# Altium PCB VM53_BASE_BOARD.PcbDoc (part 1 of 2)
Units mil, origin at the board's own origin, x right, y up, seen from the top; angles counter-clockwise.
Board outline 6151.77 x 3750.19 mil, 4 copper layers (Top Layer, Internal Plane 1, Internal Plane 2, Bottom Layer), stack 30.635 mil thick; 190 components, 126 nets, 711 pads, 402 vias.
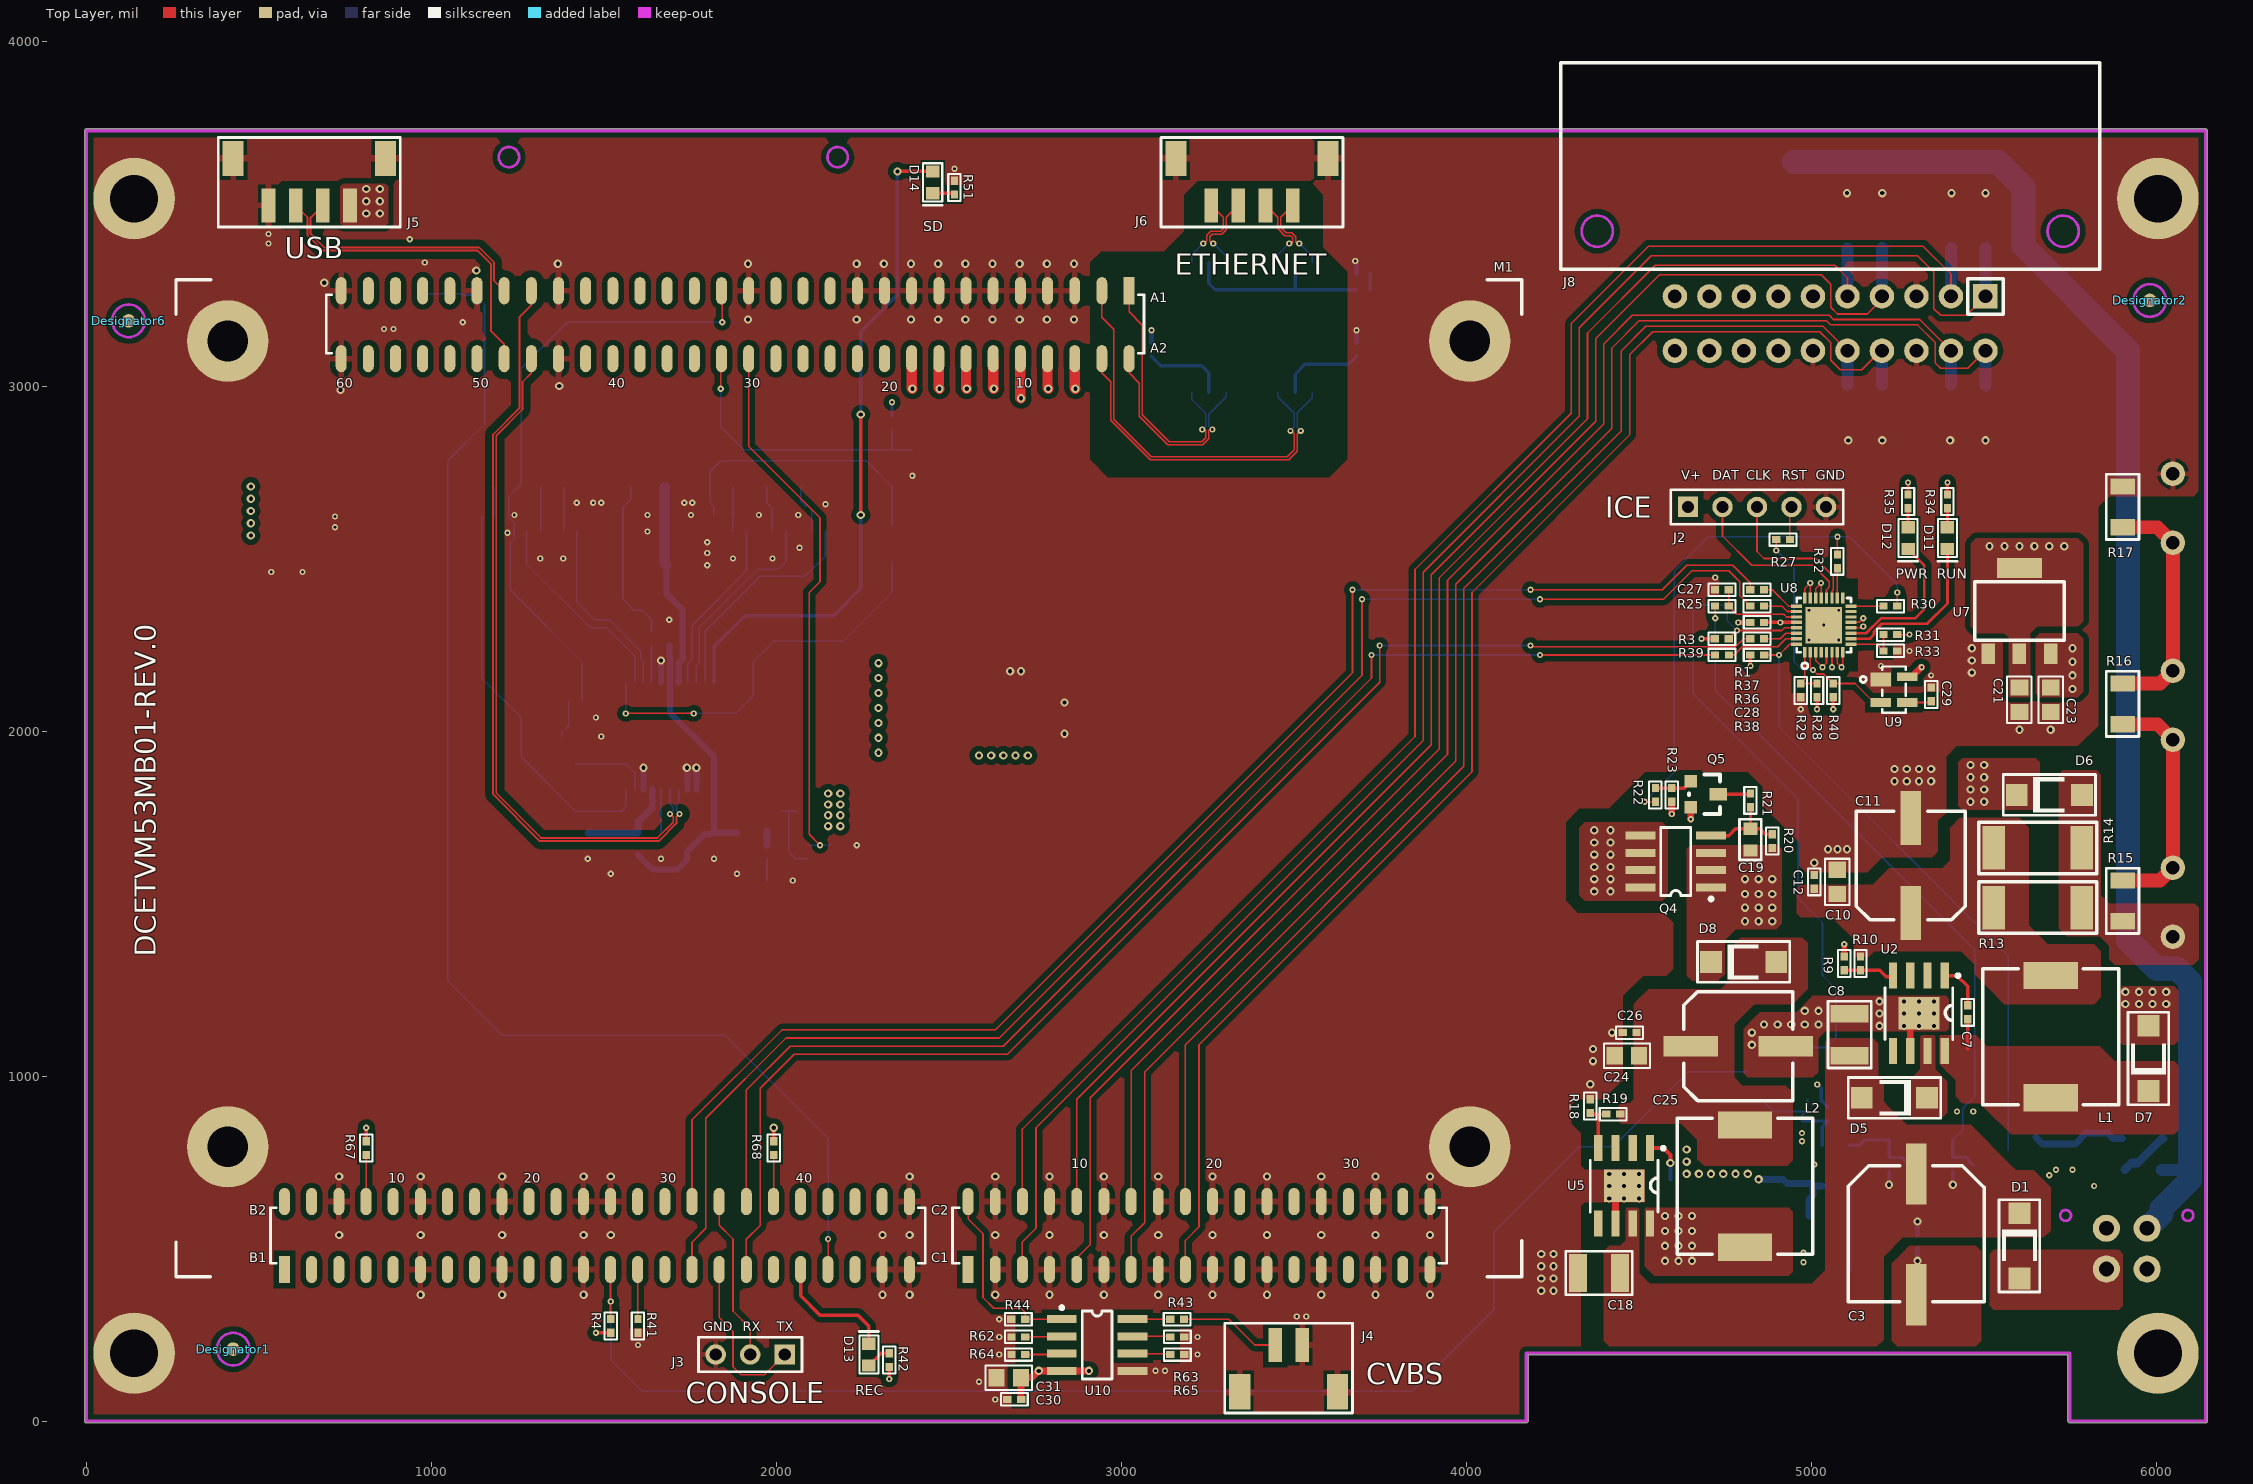
[diagram p0: Top Layer view]
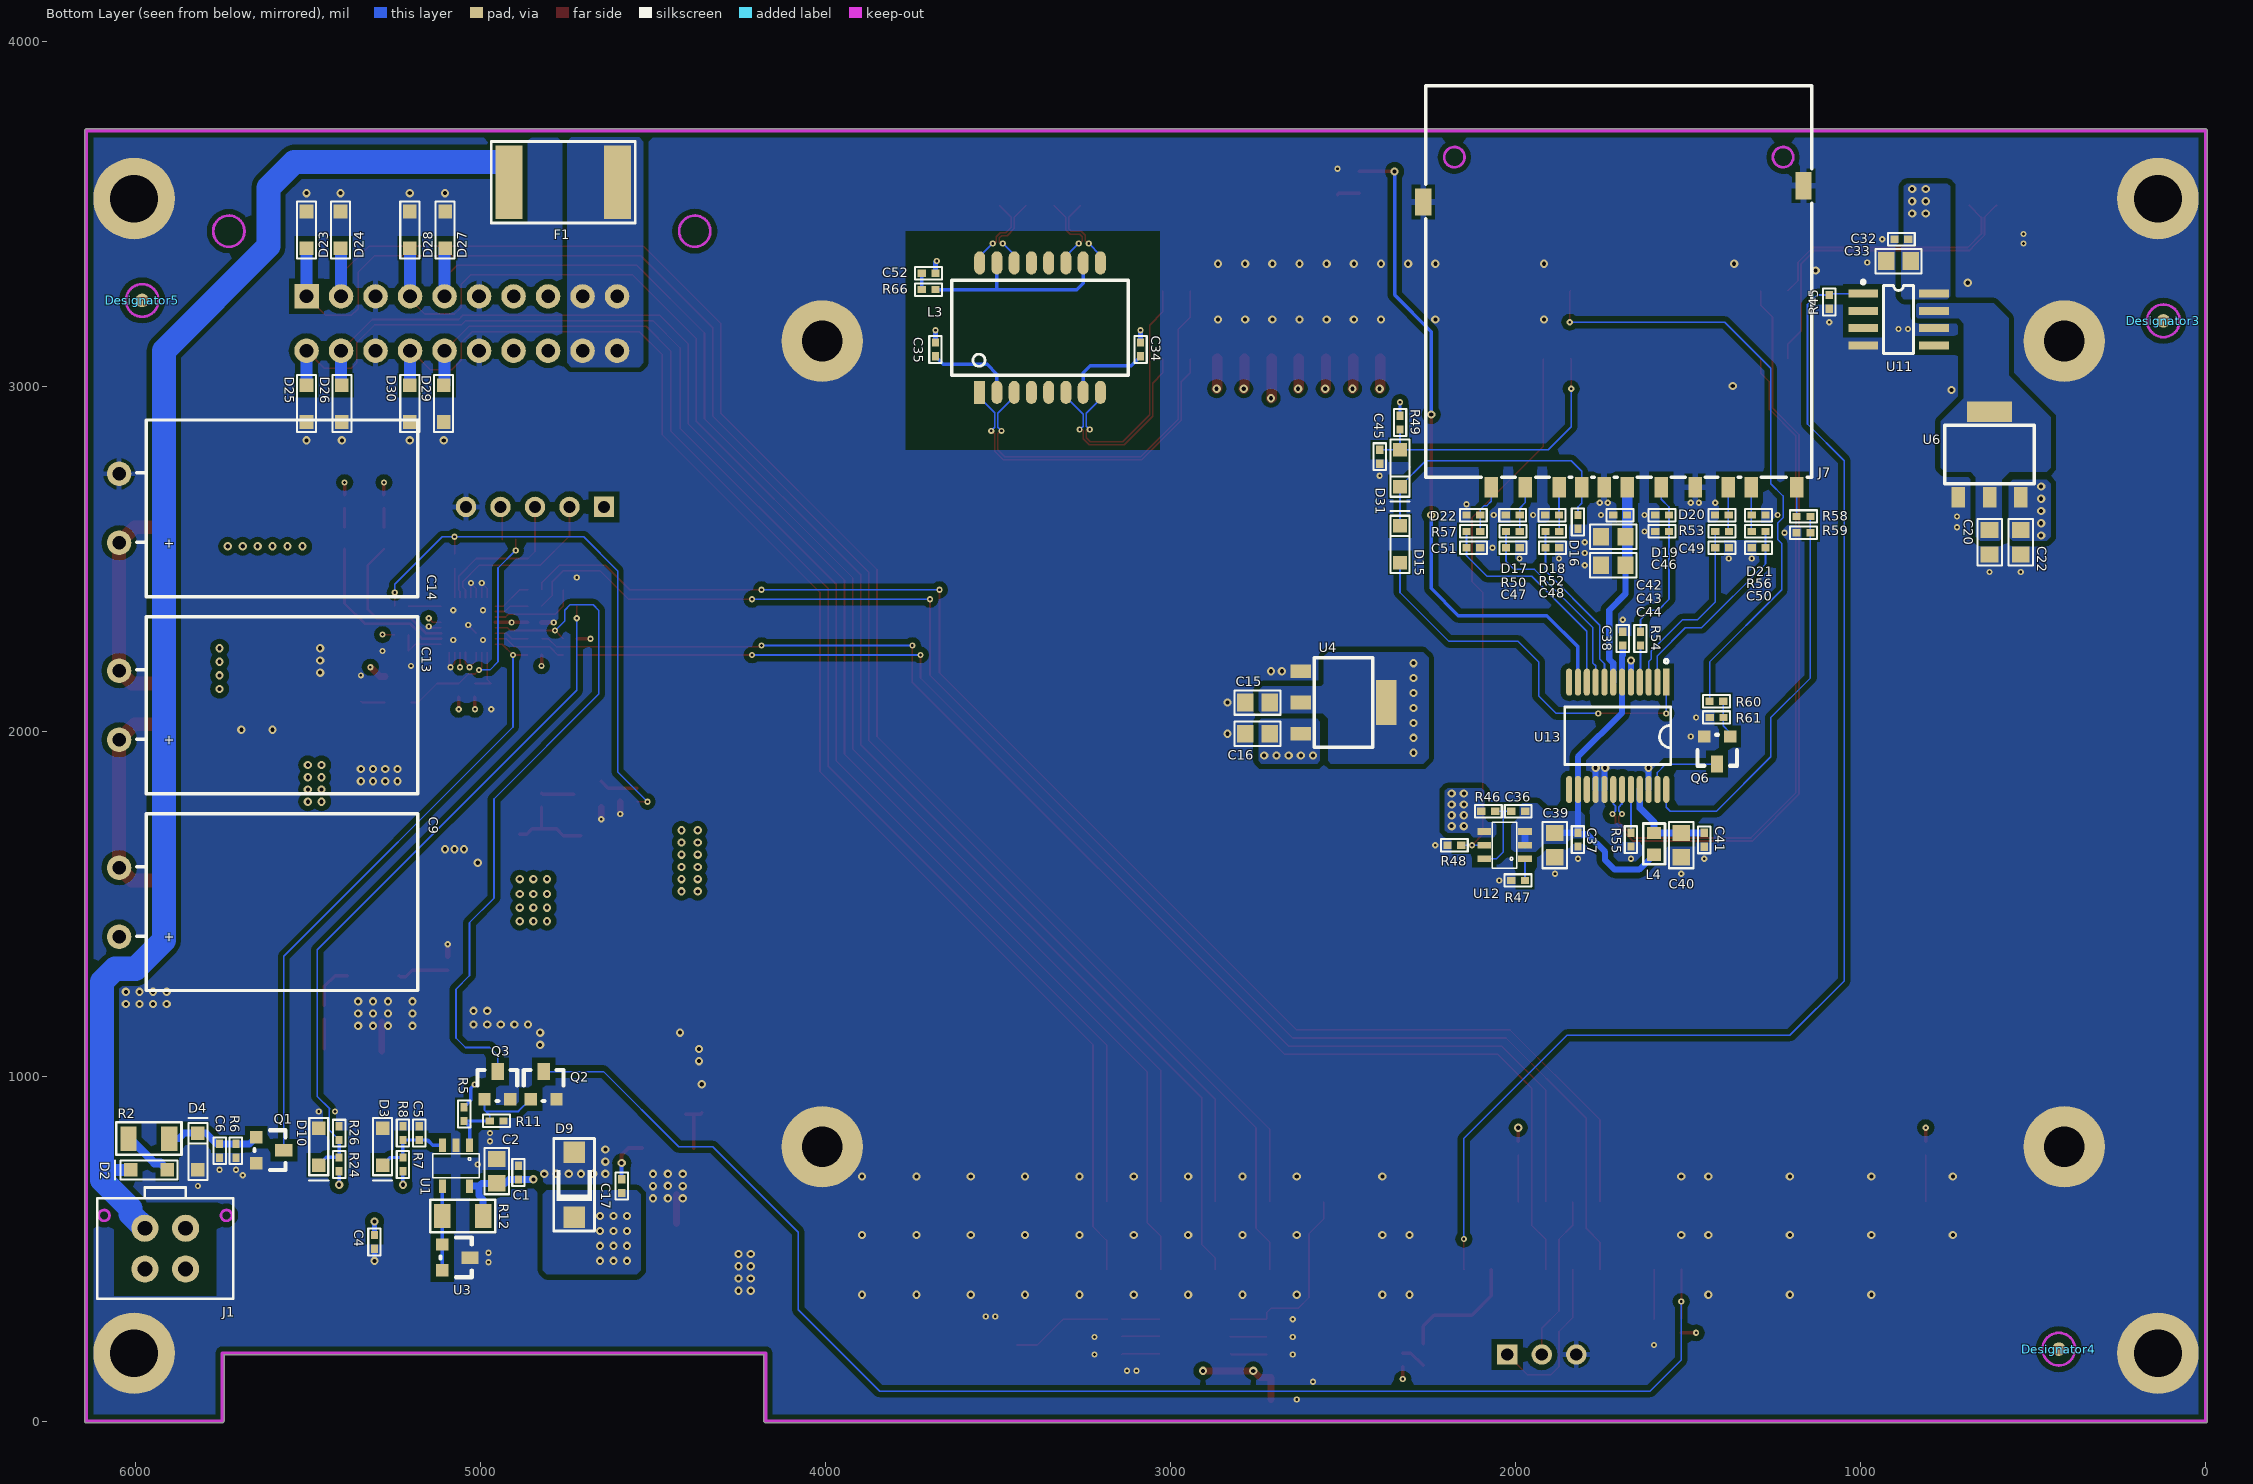
[diagram p1: Bottom Layer view, seen from below]
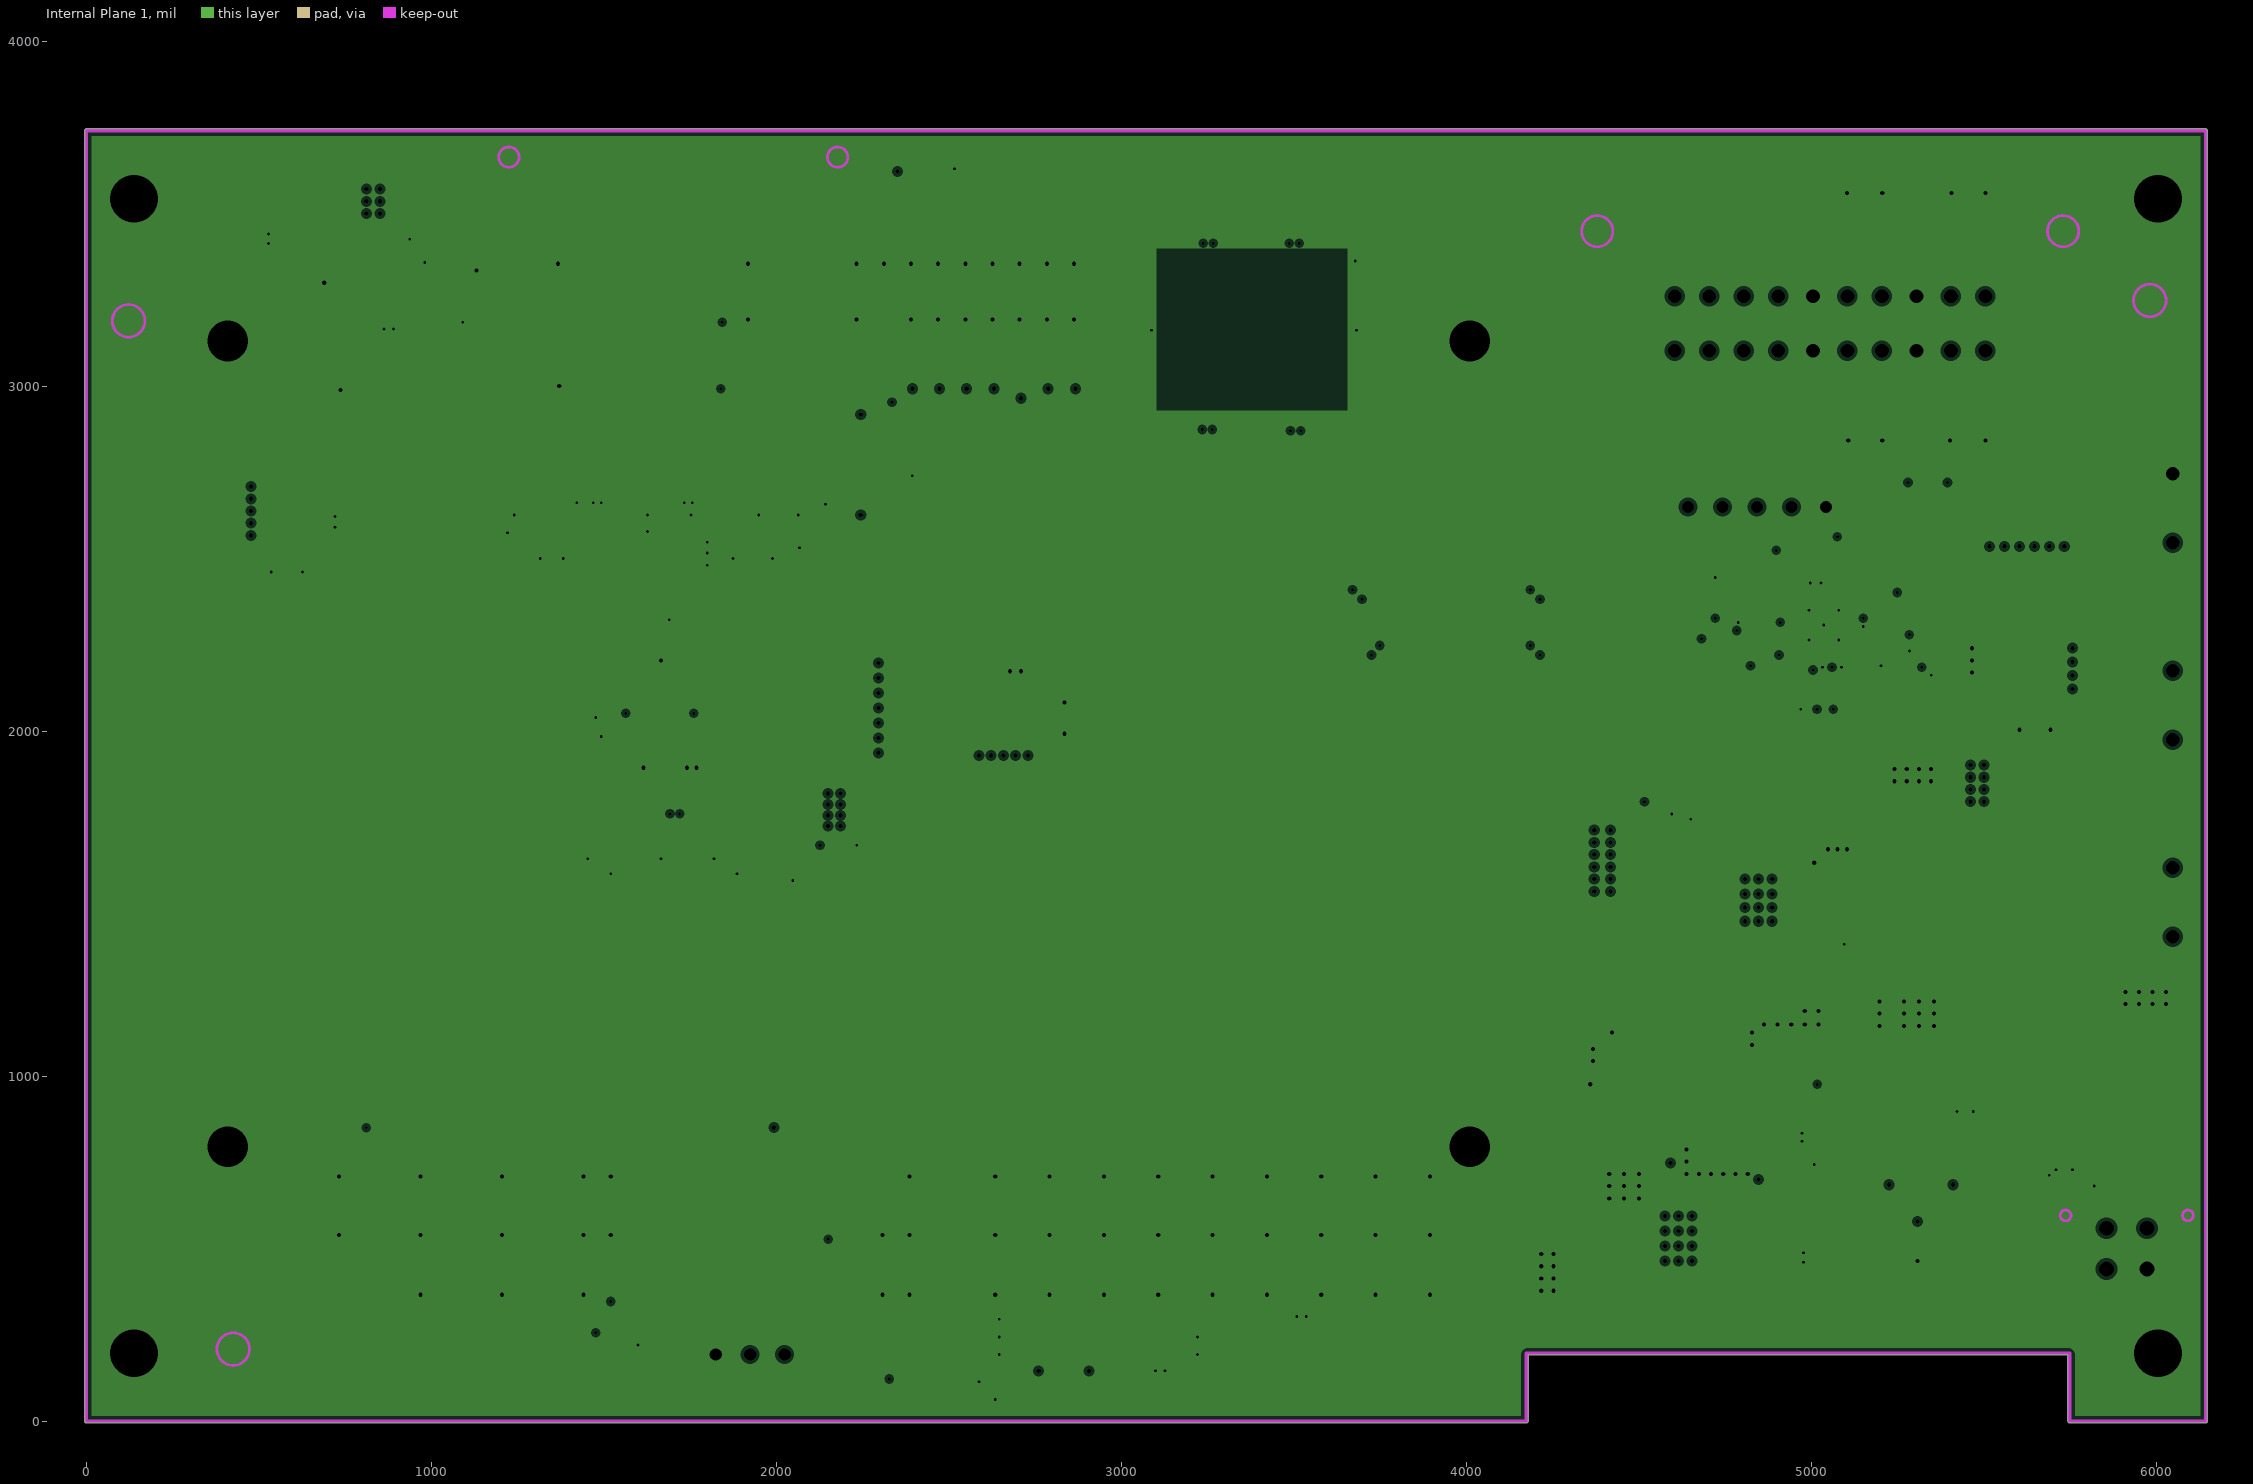
[diagram p2: Internal Plane 1, clearances drawn from the general rule]
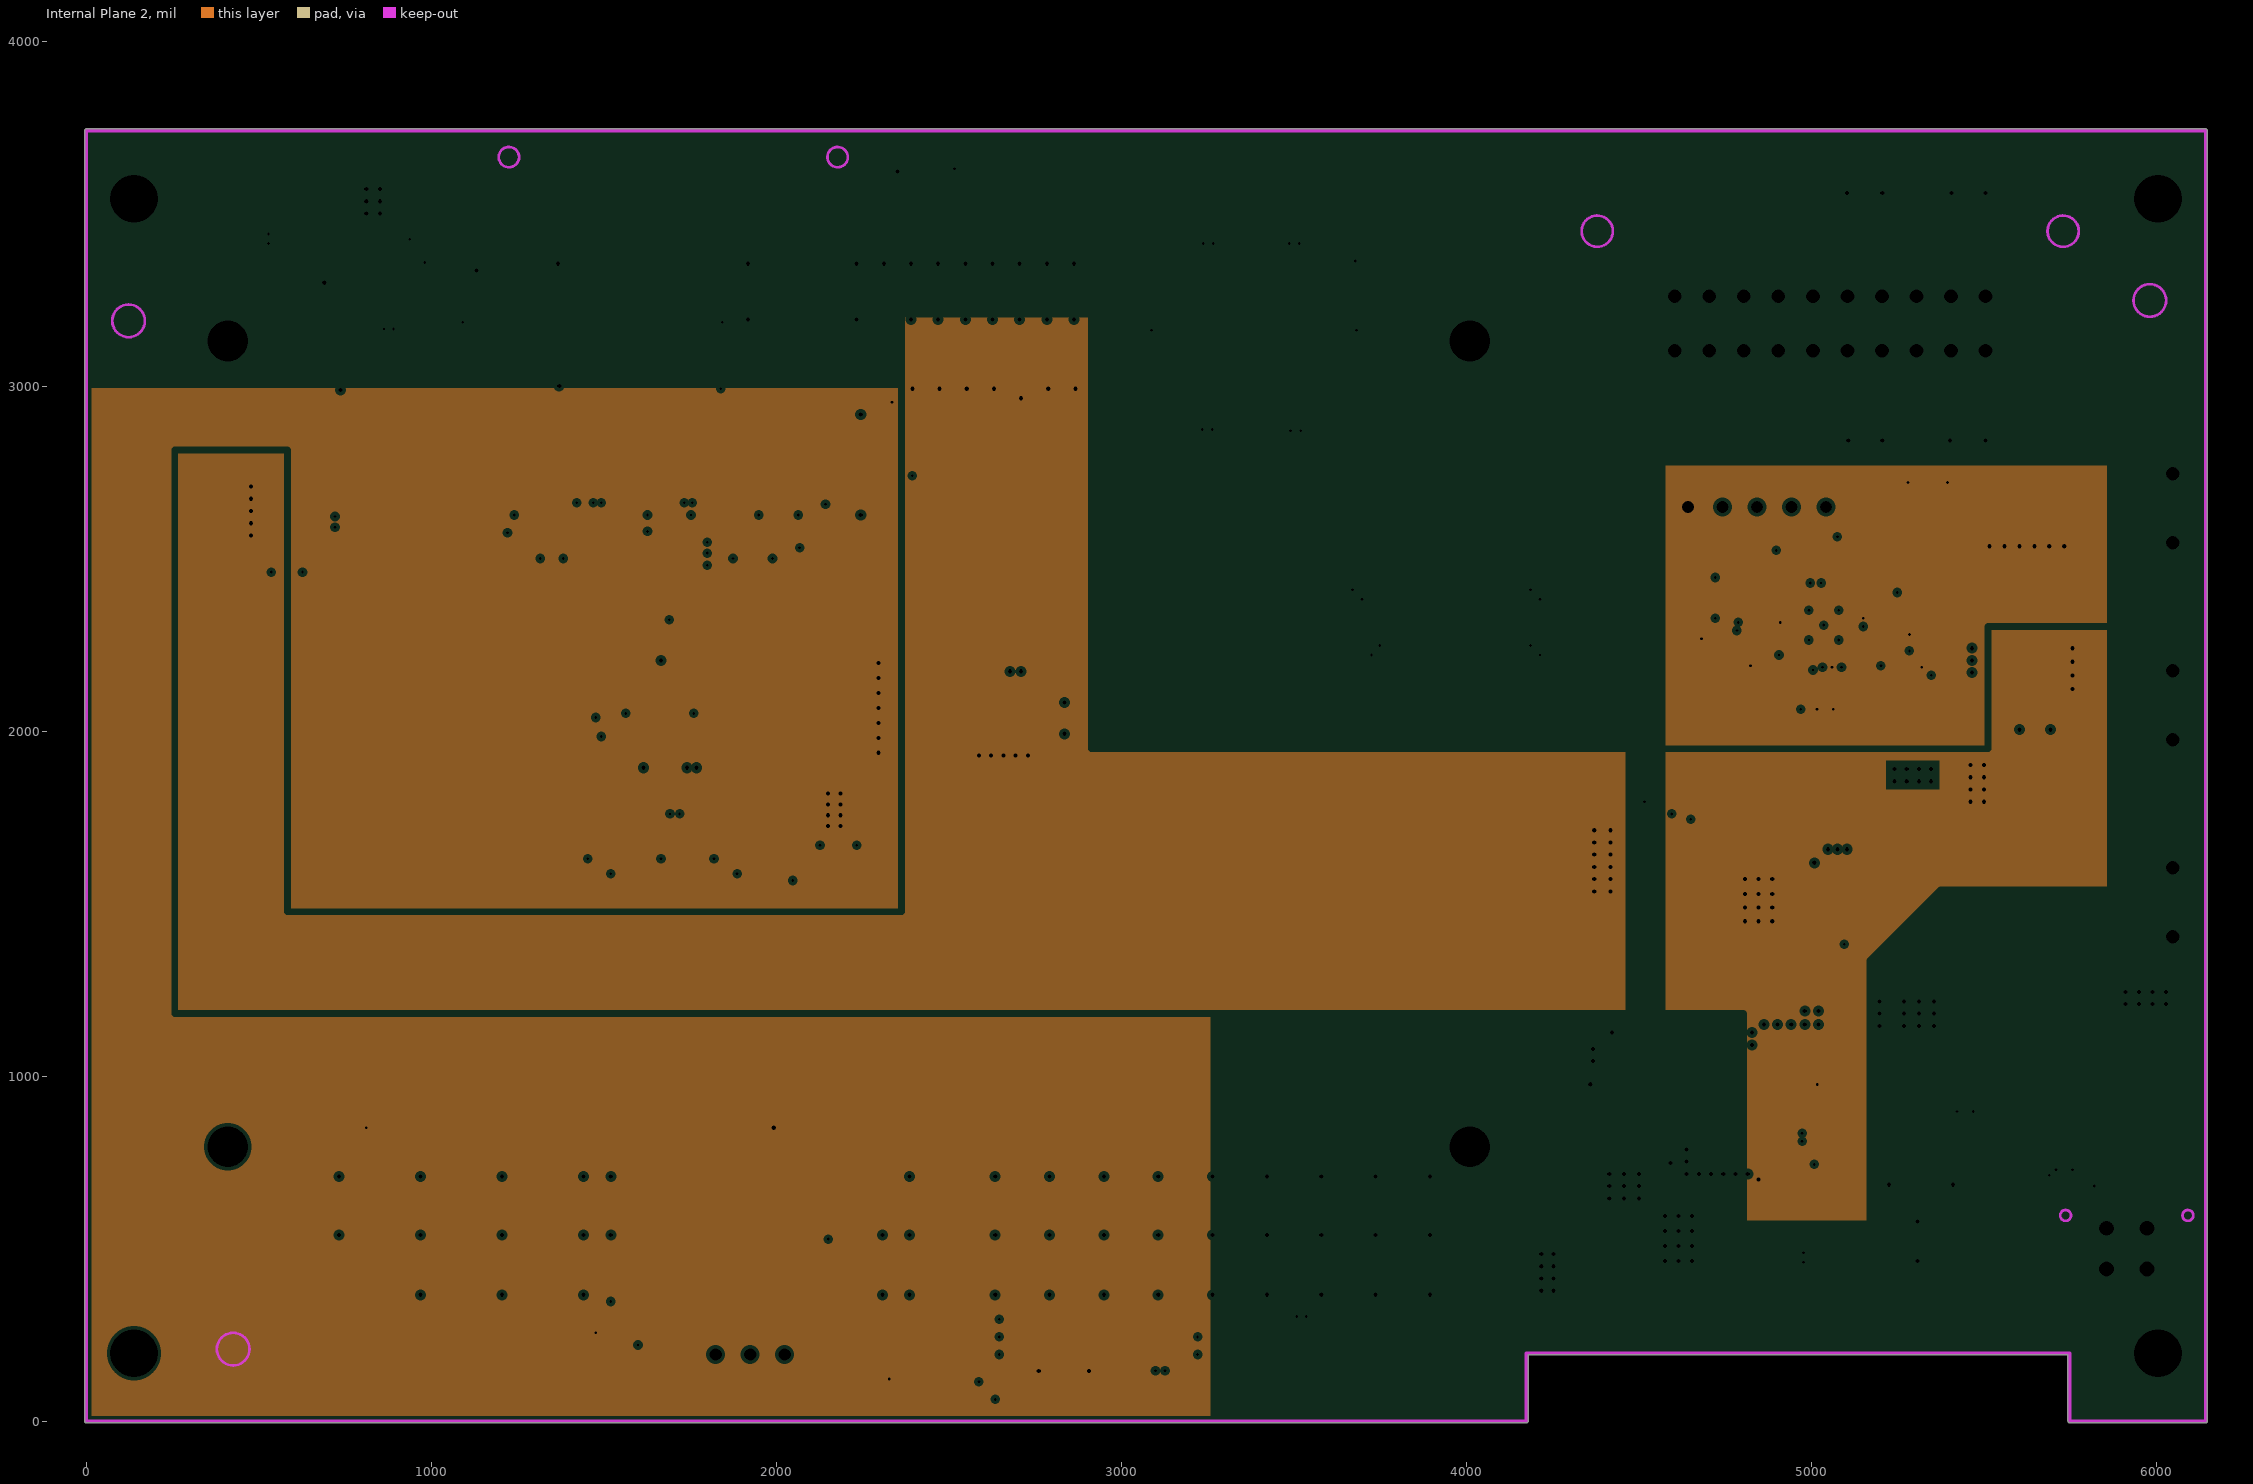
[diagram p3: Internal Plane 2, clearances drawn from the general rule]

## Layer stack, top to bottom
Top Solder: solder mask 0.4, Solder Resist, Dk 3.5
Top Layer: signal copper 1.4
Dielectric 1: core 10, FR-4, Dk 4.2
Internal Plane 1: plane copper 1.4173
Dielectric 3: prepreg 5, Dk 4.2
Internal Plane 2: plane copper 1.4173
Dielectric 2: core 10, Dk 4.2
Bottom Layer: signal copper 1.4
Bottom Solder: solder mask 0.4, Solder Resist, Dk 3.5

## Board outline
-5.02,0 ccw(c0,0) 0,-5.02 4173.23,-5.02 ccw(c4173.23,0) 4178.25,0 4178.25,191.84 5743.02,191.84 5743.02,0 ccw(c5748.03,0) 5748.03,-5.02 6141.74,-5.02 ccw(c6141.74,0) 6146.75,0 6146.75,3740.16 ccw(c6141.74,3740.16) 6141.74,3745.17 0,3745.17 ccw(c0,3740.16) -5.02,3740.16

## Design rules (kind name [scope] priority, off if disabled: settings)
Clearance Clearance_3 [(InDifferentialPairClass('All Differential Pairs')) vs InPolygon AND InNet('GND')] p1: gap=20
Clearance Clearance_2 [InPolygon AND InNet('GND')] p2: gap=15
Clearance Clearance_1 [InComponent('U8')] p3: gap=3
Clearance [All] p4: gap=5
ComponentClearance [All] p1: gap=0 collisioncheckmode=3 verticalgap=0 showdistances=FALSE
DiffPairsRouting DiffPairsRouting_1 [InDifferentialPairClass('ETH_DIFF')] p1: maxlimit=5.2 minlimit=5.2 mostfreqgap=5.2 toplayer_minwidth=3.8 toplayer_maxwidth=3.8 toplayer_prefwidth=3.8 bottomlayer_minwidth=3.8 bottomlayer_maxwidth=3.8 bottomlayer_prefwidth=3.8 maxuncoupledlength=500
DiffPairsRouting [InDifferentialPairClass('USB_DIFF')] p2: maxlimit=3.7 minlimit=3.7 mostfreqgap=3.7 toplayer_minwidth=5.3 toplayer_maxwidth=5.3 toplayer_prefwidth=5.3 bottomlayer_minwidth=5.3 bottomlayer_maxwidth=5.3 bottomlayer_prefwidth=5.3 maxuncoupledlength=500
PlaneClearance PlaneClearance_3 [InNet('PBKP')] p1: clearance=20
PlaneClearance PlaneClearance_2 [InComponent('J1')] p2: clearance=25
PlaneClearance PlaneClearance_1 [InPadClass('MT')] p3: clearance=40
PlaneClearance [All] p4: clearance=10
PlaneConnect PlaneConnect_3 [InComponent('J1')] p1: planeconnectstyle=Relief reliefexpansion=20 reliefentries=4 reliefconductorwidth=25 reliefairgap=15
PlaneConnect PlaneConnect_2 [IsVia] p2: planeconnectstyle=Direct reliefexpansion=20 reliefentries=4 reliefconductorwidth=10 reliefairgap=10
PlaneConnect PlaneConnect_1 [InPadClass('MT')] p3: planeconnectstyle=Direct reliefexpansion=20 reliefentries=4 reliefconductorwidth=10 reliefairgap=10
PlaneConnect [All] p4: planeconnectstyle=Relief reliefexpansion=20 reliefentries=4 reliefconductorwidth=10 reliefairgap=10
PolygonConnect PolygonConnect_4 [(InComponent('J4') OR InComponent('J5') OR InComponent('J6') OR InComponent('J7'))] p1: connectstyle=Relief reliefconductorwidth=18 reliefentries=4 polygonreliefangle="90 Angle" airgapwidth=10
PolygonConnect PolygonConnect_3 [(InComponent('J8') OR InComponent('J2') OR InComponent('J3') OR InComponent('C14'))] p2: connectstyle=Relief reliefconductorwidth=15 reliefentries=4 polygonreliefangle="90 Angle" airgapwidth=10
PolygonConnect PolygonConnect_2 [InPadClass('MT')] p3: connectstyle=Direct reliefconductorwidth=10 reliefentries=4 polygonreliefangle="90 Angle" airgapwidth=10
PolygonConnect PolygonConnect_1 [InComponent('M1')] p4: connectstyle=Relief reliefconductorwidth=18 reliefentries=4 polygonreliefangle="90 Angle" airgapwidth=15
PolygonConnect [All] p5: connectstyle=Direct reliefconductorwidth=10 reliefentries=4 polygonreliefangle="90 Angle" airgapwidth=10
RoutingVias [All] p1: holewidth=8 width=18 viastyle="Through Hole" minholewidth=8 minwidth=18 maxholewidth=20 maxwidth=40
SolderMaskExpansion [All] p1: expansion=4
Width [All] p1: maxlimit=200 minlimit=3 preferedwidth=4.7 minimp=50.000000 maximp=50.000000 favimp=50.000000
26 further rules are at their usual default settings.

## Classes and differential pairs
component class 07-VIDEO_PORT: D23 D24 D25 D26 D27 D28 D29 D30 F1 J8
component class 06-SD_CARD: C36 C37 C38 C39 C40 C41 C42 C43 C44 C45 C46 C47 C48 C49 C50 C51 D14 D15 D16 D17 D18 D19 D20 D21 D22 D31 J7 L4 Q6 R46 R47 R48 R49 R50 R51 R52 R53 R54 R55 R56 R57 R58 R59 R60 R61 U12 U13
component class 05-USB_ETHERNET: C32 C33 C34 C35 C52 J5 J6 L3 R45 R66 U11
component class 04-VIDEO_OUT: C30 C31 J4 R43 R44 R62 R63 R64 R65 U10
component class 03-CORE_BOARD: D13 J3 M1 R41 R42 R67 R68
component class 02-MCU: C27 C28 C29 D10 D11 D12 J2 R24 R25 R26 R27 R28 R29 R30 R31 R32 R33 R34 R35 R36 R37 R38 R39 R40 U8 U9
component class 01-POWER: C1 C2 C3 C4 C5 C6 C7 C8 C9 C10 C11 C12 C13 C14 C15 C16 C17 C18 C19 C20 C21 C22 C23 C24 C25 C26 D1 D2 D3 D4 D5 D6 D7 D8 D9 J1 L1 L2 Q1 Q2 Q3 Q4 Q5 R1 R2 R3 R4 R5 R6 R7 R8 R9 R10 R11 R12 R13 R14 R15 R16 R17 R18 R19 R20 R21 R22 R23 U1 U2 U3 U4 U5 U6 U7
pad class MT: Free-MT1 Free-MT2 Free-MT3 Free-MT4 M1-MT5 M1-MT6 M1-MT7 M1-MT8
differential pair class USB_DIFF: USB0 USB1
differential pair class ETH_DIFF: E0-RX E0-TX ETH-RX ETH-TX
differential pair USB1: +USB1_P -USB1_N
differential pair USB0: +USB0_P -USB0_N
differential pair ETH-TX: +ETH-TX_P -ETH-TX_N
differential pair ETH-RX: +ETH-RX_P -ETH-RX_N
differential pair E0-TX: +E0-TX_P -E0-TX_N
differential pair E0-RX: +E0-RX_P -E0-RX_N

## Components (designator, comment, footprint, x,y, rotation, side; value= is the part's Value field where it differs from the comment)
C1 "0.1uF/50V" 0402 4889.76,720.47 r270 bottom
C2 "10uF/16V" 0805 4952.76,759.84 r270 bottom
C3 "220uF/50V" DL-10*10.5 5303.15,543.31 r0 top
C4 "0.1uF/50V" 0402 5307.09,519.68 r270 bottom
C5 "0.1uF/50V" 0402 5177.17,834.65 r90 bottom
C6 "0.1uF/50V" 0402 5755.91,783.46 r90 bottom
C7 "0.01uF/50V" 0402 5452.76,1185.04 r270 top
C8 "10uF/50V" 1210 5110.24,1059.06 r90 top
C9 "10F/2.7V" SUPERCAP 6047.24,1503.94 r90 bottom locked
C10 "4.7uF/16V" 0805 5074.8,1598.43 r270 top
C11 "220uF/25V" DL-8*10.5 5287.4,1610.24 r180 top
C12 "0.1uF/50V" 0402 5007.87,1562.99 r90 top
C13 "10F/2.7V" SUPERCAP 6047.24,2074.8 r90 bottom locked
C14 "10F/2.7V" SUPERCAP 6047.24,2645.67 r90 bottom locked
C15 "10uF/16V" 0805 2712.6,2082.68 r0 bottom
C16 "10uF/16V" 0805 2712.6,1992.13 r0 bottom
C17 "0.01uF/50V" 0402 4590.55,681.1 r270 bottom
C18 "10uF/50V" 1210 4444.88,429.13 r180 top
C19 "1uF/16V" 0603 4822.83,1685.04 r0 top
C20 "10uF/16V" 0805 625.98,2582.68 r270 bottom
C21 "10uF/16V" 0805 5602.36,2125.98 r270 top
C22 "10uF/16V" 0805 535.43,2582.68 r270 bottom
C23 "10uF/16V" 0805 5692.91,2125.98 r270 top
C24 "4.7uF/16V" 0805 4429.13,1059.06 r0 top
C25 "220uF/25V" DL-8*10.5 4787.4,1086.61 r90 top
C26 "0.1uF/50V" 0402 4472.44,1125.98 r180 top
C27 "0.1uF/50V" 0402 4739.97,2409.45 r0 top
C28 "0.1uF/50V" 0402 4842.14,2314.96 r0 top
C29 "0.1uF/50V" 0402 5346.46,2106.3 r270 top
C30 "0.1uF/50V" 0402 2688.98,62.99 r0 top
C31 "10uF/16V" 0805 2708.66,125.98 r180 top
C32 "0.1uF/50V" 0402 881.89,3425.2 r180 bottom
C33 "10uF/16V" 0805 854.33,3362.2 r0 bottom
C34 "0.01uF/50V" 0402 3086.61,3106.3 r270 bottom
C35 "0.01uF/50V" 0402 3681.1,3106.3 r270 bottom
C36 "0.47uF/6.3V" 0402 1992.13,1767.72 r180 bottom
C37 "0.1uF/50V" 0402 1818.9,1685.04 r90 bottom
C38 "0.1uF/50V" 0402 1688.98,2267.72 r90 bottom
C39 "22uF/6.3V" 0805 1885.83,1704.72 r270 bottom
C40 "10uF/16V" 0805 1519.68,1704.72 r270 bottom
C41 "0.1uF/50V" 0402 1452.76,1685.04 r270 bottom
C42 "0.1uF/50V" 0402 1696.85,2625.98 r0 bottom
C43 "10uF/16V" 0805 1751.97,2562.99 r180 bottom
C44 "4.7uF/16V" 0805 1751.97,2480.31 r180 bottom
C45 "0.1uF/50V" 0402 2393.7,2795.28 r270 bottom
C46 "DNP" 0402 1574.99,2578.74 r0 bottom
C47 "DNP" 0402 2007.69,2531.5 r180 bottom
C48 "DNP" 0402 1893.26,2531.5 r180 bottom
C49 "DNP" 0402 1401.39,2531.5 r180 bottom
C50 "DNP" 0402 1295.28,2531.5 r0 bottom
C51 "DNP" 0402 2122.05,2531.5 r180 bottom
C52 "0.1uF/50V" 0402 3700.79,3326.77 r0 bottom
D1 "B360A" B320A 5602.36,413.39 r90 top
D2 "MM3Z5V1ST1G" SOD323F 5960.63,728.35 r180 bottom
D3 "MM3Z5V1ST1G" SOD323F 5283.46,795.28 r90 bottom
D4 "1N5819HW" 1N5819 5818.9,834.65 r270 bottom
D5 "B360A" B320A 5145.67,937.01 r0 top
D6 "B360A" B320A 5783.46,1814.96 r180 top
D7 "B360A" B320A 5976.38,1145.67 r270 top
D8 "B360A" B320A 4897.64,1330.71 r180 top
D9 "B360A" B320A 4728.35,779.53 r270 bottom
D10 "MM3Z4V7ST1G" SOD323F 5468.5,795.28 r90 bottom
D11 "LED GREEN" LED0603 5393.7,2590.55 r0 top
D12 "LED GREEN" LED0603 5279.53,2590.55 r0 top
D13 "LED GREEN" LED0603 2267.72,161.42 r180 top
D14 "LED GREEN" LED0603 2452.76,3622.05 r0 top
D15 "1N5819HW" 1N5819 2334.65,2594.49 r270 bottom
D16 "ESD0402E002M05" 0402 1818.9,2606.3 r270 bottom
D17 "ESD0402E002M05" 0402 2007.87,2625.98 r0 bottom
D18 "ESD0402E002M05" 0402 1893.7,2625.98 r0 bottom
D19 "ESD0402E002M05" 0402 1574.99,2625.98 r0 bottom
D20 "ESD0402E002M05" 0402 1401.57,2625.98 r0 bottom
D21 "ESD0402E002M05" 0402 1295.28,2625.98 r180 bottom
D22 "ESD0402E002M05" 0402 2122.05,2625.98 r0 bottom
D23 "PESD5V0L1BA" PESD 5503.94,3452.76 r90 bottom
D24 "PESD5V0L1BA" PESD 5405.51,3452.76 r90 bottom
D25 "PESD5V0L1BA" PESD 5503.94,2948.82 r270 bottom
D26 "PESD5V0L1BA" PESD 5401.57,2948.82 r270 bottom
D27 "PESD5V0L1BA" PESD 5102.36,3452.76 r270 bottom
D28 "PESD5V0L1BA" PESD 5204.72,3452.76 r270 bottom
D29 "PESD5V0L1BA" PESD 5106.3,2948.82 r90 bottom
D30 "PESD5V0L1BA" PESD 5204.72,2948.82 r90 bottom
D31 "1N5819HW" 1N5819 2334.65,2708.66 r90 bottom
Designator1 "Comment" MARK 425.2,208.66 r0 top locked
Designator2 "Comment" MARK 5980.32,3248.03 r0 top locked
Designator3 "Comment" MARK 122.05,3188.98 r180 bottom locked
Designator4 "Comment" MARK 425.2,208.66 r180 bottom locked
Designator5 "Comment" MARK 5980.32,3248.03 r180 bottom locked
Designator6 "Comment" MARK 122.05,3188.98 r0 top locked
F1 "3A/16V" 2920 4917.32,3590.55 r180 bottom
J1 "POWER" 3030WV-F-2*2P 5913.39,500 r180 bottom
J2 "MCU ICE" HDR1X5 4641.73,2649.61 r0 top
J3 "DEBUG" HDR1X3 2023.62,192.91 r180 top
J4 "CVBS OUT" CONN-2.0-SMD-2P-V 3444.88,220.47 r0 top
J5 "USB HOST" CONN-2.0-SMD-4P-V 763.78,3523.62 r180 top
J6 "ETHERNET" CONN-2.0-SMD-4P-V 3496.06,3523.62 r180 top
J7 "SDCARD" SDCARD 1700.79,2736.22 r0 bottom locked
J8 "Header 10X2" CONN2X10 5503.94,3102.36 r270 top locked
L1 "8.2uH/3A" IND_10X10 5692.91,1114.17 r180 top
L2 "8.2uH/3A" IND_10X10 4807.09,681.1 r180 top
L3 "TRC1102" TRC1102 3377.95,3169.29 r90 bottom
L4 "120ohm/100MHz 1A" 0603 1598.43,1673.23 r0 bottom
M1 "EM9708" EM9708 409.45,795.28 r0 top locked
Q1 "S9014" NPN 5649.61,822.83 r270 bottom
Q2 "BSS138P" NPN 4854.33,933.07 r180 bottom
Q3 "BSS138P" NPN 4988.19,933.07 r180 bottom
Q4 "AO4435" SO8 4606.3,1622.05 r90 top
Q5 "S9014" NPN 4649.61,1854.33 r270 top
Q6 "S9014" NPN 1377.95,1984.25 r0 bottom
R1 "47K" 0402 4842.52,2220.47 r180 top
R2 "15K(0.25W)" 1206 5901.57,818.9 r0 bottom
R3 "10K" 0402 4739.78,2267.72 r180 top
R4 "10K" 0402 1519.68,275.84 r270 top
R5 "15K" 0402 5047.24,889.76 r90 bottom
R6 "47K" 0402 5708.66,783.46 r90 bottom
R7 "22.1K/1%" 0402 5224.41,744.09 r270 bottom
R8 "10K/1%" 0402 5224.41,834.65 r90 bottom
R9 "1K/1%" 0402 5094.49,1326.77 r270 top
R10 "4.99K/1%" 0402 5141.73,1326.77 r270 top
R11 "30K" 0402 4952.76,870.08 r0 bottom
R12 "300(0.25W)" 1206 4992.13,594.49 r0 bottom
R13 "20/1W" 2512 5527.56,1488.19 r0 top
R14 "20/1W" 2512 5527.56,1661.42 r0 top
R15 "560/0.25W" 1206 5901.57,1448.82 r90 top
R16 "560/0.25W" 1206 5901.57,2019.68 r90 top
R17 "560/0.25W" 1206 5901.57,2590.55 r90 top
R18 "1K/1%" 0402 4358.27,913.39 r270 top
R19 "5.76K/1%" 0402 4425.2,889.76 r180 top
R20 "100K" 0402 4885.83,1681.1 r90 top
R21 "10K" 0402 4822.83,1799.21 r90 top
R22 "4.7K" 0402 4547.24,1814.96 r270 top
R23 "47K" 0402 4594.49,1814.96 r270 top
R24 "510K/1%" 0402 5409.45,744.09 r90 bottom
R25 "1K" 0402 4739.97,2362.2 r180 top
R26 "51K/1%" 0402 5409.45,834.65 r270 bottom
R27 "0" 0402 4917.32,2555.12 r180 top
R28 "510K/1%" 0402 5015.75,2117.67 r90 top
R29 "51K/1%" 0402 4968.5,2117.67 r90 top
R30 "DNP" 0402 5228.35,2362.2 r180 top
R31 "DNP" 0402 5228.35,2279.53 r180 top
R32 "0" 0402 5074.8,2492.13 r270 top
R33 "0" 0402 5228.35,2232.28 r180 top
R34 "330" 0402 5393.7,2665.35 r90 top
R35 "330" 0402 5279.53,2665.35 r90 top
R36 "100" 0402 4842.08,2362.2 r0 top
R37 "100" 0402 4842.08,2409.45 r0 top
R38 "100" 0402 4842.08,2267.72 r0 top
R39 "100" 0402 4740.16,2220.47 r0 top
R40 "47K" 0402 5062.99,2117.67 r90 top
R41 "10K" 0402 1598.43,275.59 r90 top
R42 "330" 0402 2326.77,177.17 r270 top
R43 "75" 0402 3161.42,295.28 r180 top
R44 "75" 0402 2700.79,295.28 r180 top
R45 "DNP" 0402 1090.55,3244.09 r270 bottom
R46 "20K" 0402 2078.74,1767.72 r0 bottom
R47 "1K" 0402 1992.13,1566.93 r0 bottom
R48 "DNP" 0402 2177.17,1669.29 r0 bottom
R49 "10K" 0402 2334.65,2893.7 r90 bottom
R50 "22" 0402 2007.69,2578.74 r180 bottom
R51 "330" 0402 2515.75,3574.8 r90 top
R52 "22" 0402 1893.26,2578.74 r180 bottom
R53 "22" 0402 1401.39,2578.74 r180 bottom
R54 "22" 0402 1637.8,2267.72 r90 bottom
R55 "680" 0402 1665.35,1685.04 r90 bottom
R56 "22" 0402 1295.28,2578.74 r0 bottom
R57 "22" 0402 2122.05,2578.74 r180 bottom
R58 "0" 0402 1165.35,2622.05 r180 bottom
R59 "4.7K" 0402 1165.35,2574.8 r180 bottom
R60 "4.7K" 0402 1417.32,2086.61 r0 bottom
R61 "47K" 0402 1417.32,2039.37 r180 bottom
R62 "75" 0402 2700.79,244.09 r0 top
R63 "75" 0402 3161.42,244.09 r0 top
R64 "75" 0402 2700.79,192.91 r0 top
R65 "75" 0402 3161.42,192.91 r0 top
R66 "75" 0402 3700.79,3279.53 r0 bottom
R67 "10K" 0402 811.02,791.34 r270 top
R68 "10K" 0402 1992.13,791.34 r270 top
U1 "TLV3401IDBVR" SOT23-5 5031.5,799.21 r0 bottom
U2 "LM22676MR-ADJ" PSO8 5385.83,1291.34 r180 top
U3 "TL431AIDBZR" SOT23-3 5110.24,511.81 r270 bottom
U4 "LM1117MPX-3.3" AMS1117 2622.05,2082.68 r270 bottom
U5 "LM22676MR-ADJ" PSO8 4531.5,791.34 r180 top
U6 "LM1117MPX-5.0" AMS1117 625.98,2677.17 r180 bottom
U7 "LM1117MPX-3.3" AMS1117 5602.36,2224.41 r0 top
U8 "MINI54TDE" QFN33 4980.31,2228.35 r90 top
U9 "STM6315RDW13F" SOT143-4 5200.79,2149.61 r270 top
U10 "THS7314" so8 2929.13,220.47 r270 top
U11 "MIC2026-1YM" SO8 889.76,3192.91 r270 bottom
U12 "TPS27081ADDC" SOT23-6 1972.44,1629.92 r90 bottom
U13 "GL823-HGG" SSOP24 1562.99,2141.73 r270 bottom

## Footprints (in the part's own frame and the unit in brackets; to place one, negate y for a bottom-side part, rotate by r counter-clockwise, add the part's x,y. Pads: shape width x height; smd on the part's side, far side on the other; paste and mask are expansions set on the pad)
1N5819 [mm]
  rect 1x1 smd: 1(2.7,0) 2(0,0)
  silkscreen extent -1.1,-0.7 3.45,0.7
0402 [mil] "Chip Capacitor, Body 1.0x0.5mm, IPC High Density"
  rect 24x21 smd: 1(20.13,0) 2(-19.87,0)
  silkscreen extent -39,-18 39,18
0603 [mm]
  rect 1x0.9 smd: 1(0,0.8) 2(0,-0.8)
  silkscreen extent -0.8,-1.5 0.8,1.5
0805 [mm]
  rect 1.2x1.3 smd: 1(0,0) 2(1.8,0)
  silkscreen extent -0.8,-0.9 2.6,0.9
1206 [mm]
  rect 1.2x1.8 smd: 1(0,0) 2(3,0)
  silkscreen extent -0.9,-1.2 3.9,1.2
1210 [mm]
  rect 1.3x2.8 smd: 1(0,0) 2(3.1,0)
  silkscreen extent -0.9,-1.6 4,1.6
2512 [mm]
  rect 1.65x3.2 smd: 1(0,0) 2(6.48,0)
  silkscreen extent -1.1,-1.9 7.6,1.9
2920 [mm]
  rect 2x5.4 smd: 1(0,0) 2(8,0)
  silkscreen extent -1.3,-3 9.3,3
3030WV-F-2*2P [mm]
  round 2 hole 1.1: 1(1.5,-1.5) 2(-1.5,-1.5) 3(1.5,1.5) 4(-1.5,1.5)
  Keep-Out Layer circle w0.2: c4.5,2.44 r0.4
  Keep-Out Layer circle w0.2: c-4.5,2.44 r0.4
  silkscreen extent -5,-3.7 5,4.5
AMS1117 [mm]
  rect 1x1.5 smd: 1(-2.3,0) 2(0,0) 3(2.3,0)
  rect 3.3x1.5 smd: 4(0,6.3)
  silkscreen extent -3.3,1 3.3,5.3
B320A [mm]
  rect 1.6x1.6 smd: 1(0,0) 2(4.8,0)
  silkscreen extent -1,-1.5 5.8,1.5
CONN2X10 [mm]
  rect 1.8x1.8 hole 1: 1(-4,0)
  round 1.8 hole 1: 2(0,0) 3(-4,-2.54) 4(0,-2.54) 5(-4,-5.08) 6(0,-5.08) 7(-4,-7.62) 8(0,-7.62) 9(-4,-10.16) 10(0,-10.16) 11(-4,-12.7) 12(0,-12.7) 13(-4,-15.24) 14(0,-15.24) 15(-4,-17.78) 16(0,-17.78) 17(-4,-20.32) 18(0,-20.32) 19(-4,-22.86) 20(0,-22.86)
  Keep-Out Layer circle w0.2: c-8.8,5.72 r1.15
  Keep-Out Layer circle w0.2: c-8.8,-28.58 r1.15
  silkscreen extent -21.2,-31.28 -2.7,8.42
CONN-2.0-SMD-2P-V [mm]
  rect 1x2.5 smd: 1(0,0) 2(2,0)
  rect 1.55x2.6 smd: ""(-2.6,-3.45) ""(4.6,-3.45)
  silkscreen extent -3.7,-5 5.7,1.6
CONN-2.0-SMD-4P-V [mm]
  rect 1x2.5 smd: 1(0,0) 2(2,0) 3(4,0) 4(6,0)
  rect 1.55x2.6 smd: ""(-2.6,-3.45) ""(8.6,-3.45)
  silkscreen extent -3.7,-5 9.7,1.6
DL-8*10.5 [mm]
  rect 1.5x4 smd: 1(0,3.5) 2(0,-3.5)
  silkscreen extent -4,-4 4,4
DL-10*10.5 [mm]
  rect 1.5x4.5 smd: 1(0,4.4) 2(0,-4.5)
  silkscreen extent -5,-5 5,5
EM9708 [mm]
  rect 0.8x2 smd: A1(66.35,63.014) B1(4.178,-9.038) C1(54.501,-9.038)
  oval 0.8x2 smd: A2(66.35,58.014) A3(64.35,63.014) A4(64.35,58.014) A5(62.35,63.014) A6(62.35,58.014) A7(60.35,63.014) A8(60.35,58.014) A9(58.35,63.014) A10(58.35,58.014) A11(56.35,63.014) A12(56.35,58.014) A13(54.35,63.014) A14(54.35,58.014) A15(52.35,63.014) A16(52.35,58.014) A17(50.35,63.014) A18(50.35,58.014) A19(48.35,63.014) A20(48.35,58.014) A21(46.35,63.014) A22(46.35,58.014) A23(44.35,63.014) A24(44.35,58.014) A25(42.35,63.014) A26(42.35,58.014) A27(40.35,63.014) A28(40.35,58.014) A29(38.35,63.014) A30(38.35,58.014) A31(36.35,63.014) A32(36.35,58.014) A33(34.35,63.014) A34(34.35,58.014) A35(32.35,63.014) A36(32.35,58.014) A37(30.35,63.014) A38(30.35,58.014) A39(28.35,63.014) A40(28.35,58.014) A41(26.35,63.014) A42(26.35,58.014) A43(24.35,63.014) A44(24.35,58.014) A45(22.35,63.014) A46(22.35,58.014) A47(20.35,63.014) A48(20.35,58.014) A49(18.35,63.014) A50(18.35,58.014) A51(16.35,63.014) A52(16.35,58.014) A53(14.35,63.014) A54(14.35,58.014) A55(12.35,63.014) A56(12.35,58.014) A57(10.35,63.014) A58(10.35,58.014) A59(8.35,63.014) A60(8.35,58.014) B2(4.178,-4.038) B3(6.178,-9.038) B4(6.178,-4.038) B5(8.178,-9.038) B6(8.178,-4.038) B7(10.178,-9.038) B8(10.178,-4.038) B9(12.178,-9.038) B10(12.178,-4.038) B11(14.178,-9.038) B12(14.178,-4.038) B13(16.178,-9.038) B14(16.178,-4.038) B15(18.178,-9.038) B16(18.178,-4.038) B17(20.178,-9.038) B18(20.178,-4.038) B19(22.178,-9.038) B20(22.178,-4.038) B21(24.178,-9.038) B22(24.178,-4.038) B23(26.178,-9.038) B24(26.178,-4.038) B25(28.178,-9.038) B26(28.178,-4.038) B27(30.178,-9.038) B28(30.178,-4.038) B29(32.178,-9.038) B30(32.178,-4.038) B31(34.178,-9.038) B32(34.178,-4.038) B33(36.178,-9.038) B34(36.178,-4.038) B35(38.178,-9.038) B36(38.178,-4.038) B37(40.178,-9.038) B38(40.178,-4.038) B39(42.178,-9.038) B40(42.178,-4.038) B41(44.178,-9.038) B42(44.178,-4.038) B43(46.178,-9.038) B44(46.178,-4.038) B45(48.178,-9.038) B46(48.178,-4.038) B47(50.178,-9.038) B48(50.178,-4.038) C2(54.501,-4.038) C3(56.501,-9.038) C4(56.501,-4.038) C5(58.501,-9.038) C6(58.501,-4.038) C7(60.501,-9.038) C8(60.501,-4.038) C9(62.501,-9.038) C10(62.501,-4.038) C11(64.501,-9.038) C12(64.501,-4.038) C13(66.501,-9.038) C14(66.501,-4.038) C15(68.501,-9.038) C16(68.501,-4.038) C17(70.501,-9.038) C18(70.501,-4.038) C19(72.501,-9.038) C20(72.501,-4.038) C21(74.501,-9.038) C22(74.501,-4.038) C23(76.501,-9.038) C24(76.501,-4.038) C25(78.501,-9.038) C26(78.501,-4.038) C27(80.501,-9.038) C28(80.501,-4.038) C29(82.501,-9.038) C30(82.501,-4.038) C31(84.501,-9.038) C32(84.501,-4.038) C33(86.501,-9.038) C34(86.501,-4.038) C35(88.501,-9.038) C36(88.501,-4.038)
  round 6 hole 3: MT5(0,59.309) MT6(0,0) MT7(91.44,59.309) MT8(91.44,0)
  silkscreen extent -3.81,-9.59 95.25,63.82
HDR1X3 [mm] "Connector; Header; 3 Position"
  rect 1.5x1.5 hole 0.9: 1(0,0)
  round 1.5 hole 0.9: 2(2.54,0) 3(5.08,0)
  silkscreen extent -1.27,-1.27 6.35,1.27
HDR1X5 [mm] "Connector; Header; 5 Position"
  rect 1.5x1.5 hole 0.9: 1(0,0)
  round 1.5 hole 0.9: 2(2.54,0) 3(5.08,0) 4(7.62,0) 5(10.16,0)
  silkscreen extent -1.27,-1.27 11.43,1.27
IND_10X10 [mm]
  rect 4x2 smd: 1(0,4.5) 2(0,-4.5)
  silkscreen extent -5,-5 5,5
LED0603 [mm]
  rect 1x0.9 smd: 1(0,0) 2(0,-1.6)
  silkscreen extent -0.7,-2.5 0.7,0.6
MARK [mm]
  round 1 smd paste-0.5 mask+0.6: ""(0,0)
  Keep-Out Layer circle w0.2: c0,0 r1.2
NPN [mil]
  rect 36x50 smd: 1(38,80)
  rect 36x36 smd: 2(0,0) 3(75,0)
  silkscreen extent -20,-5 95,85
PESD [mm]
  rect 1x1 smd: 1(-1.35,0) 2(1.35,0)
  silkscreen extent -2.1,-0.7 2.1,0.7
PSO8 [mm]
  rect 0.6x1.9 smd: 1(0,0) 2(1.27,0) 3(2.54,0) 4(3.81,0) 5(3.81,5.56) 6(2.54,5.56) 7(1.27,5.56) 8(0,5.56)
  rect 3x2.4 smd: 9(1.9,2.78)
  silkscreen extent -1.1,-0.11 4.4,4.7
QFN33 [mm]
  rect 0.8x0.25 smd: 1(0,0) 2(0,-0.4) 3(0,-0.8) 4(0,-1.2) 5(0,-1.6) 6(0,-2) 7(0,-2.4) 8(0,-2.8) 17(4,-2.8) 18(4,-2.4) 19(4,-2) 20(4,-1.6) 21(4,-1.2) 22(4,-0.8) 23(4,-0.4) 24(4,0)
  rect 0.25x0.8 smd: 9(0.6,-3.4) 10(1,-3.4) 11(1.4,-3.4) 12(1.8,-3.4) 13(2.2,-3.4) 14(2.6,-3.4) 15(3,-3.4) 16(3.4,-3.4) 25(3.4,0.6) 26(3,0.6) 27(2.6,0.6) 28(2.2,0.6) 29(1.8,0.6) 30(1.4,0.6) 31(1,0.6) 32(0.6,0.6)
  rect 2.7x2.7 smd: 33(2,-1.4)
  silkscreen extent -1.22,-3.4 4,0.6
SDCARD [mm]
  rect 1x1.5 smd: 1(6.88,0.75) 2(4.38,0.75) 3(1.08,0.75) 4(-0.63,0.75) 5(-3.13,0.75) 6(-5.63,0.75) 7(-8.05,0.75) 8(-9.75,0.75) 9(9.38,0.75) 10(2.73,0.75) 11(-13.1,0.75)
  rect 1.2x2 smd: ""(-13.6,-21.45) ""(14.4,-20.25)
  Keep-Out Layer circle w0.2: c12.1,-23.55 r0.75
  Keep-Out Layer circle w0.2: c-12.1,-23.55 r0.75
  silkscreen extent -14.2,-28.8 14.2,0
SO8 [mm] "Small Outline; 8 Leads; Body Width 3.9 mm; Pitch 1.27 mm"
  rect 0.6x2.2 smd: 1(-1.905,-2.6) 2(-0.635,-2.6) 3(0.635,-2.6) 4(1.905,-2.6) 5(1.905,2.6) 6(0.635,2.6) 7(-0.635,2.6) 8(-1.905,2.6)
  silkscreen extent -2.88,-2.72 2.5,1.1
so8 [mm] "Small Outline; 8 Leads; Body Width 3.9 mm; Pitch 1.27 mm"
  rect 0.6x2.2 smd: 1(-1.905,-2.6) 2(-0.635,-2.6) 3(0.635,-2.6) 4(1.905,-2.6) 5(1.905,2.6) 6(0.635,2.6) 7(-0.635,2.6) 8(-1.905,2.6)
  silkscreen extent -2.88,-2.72 2.5,1.1
SOD323F [mm]
  rect 1x1 smd: 1(-1.35,0) 2(1.35,0)
  silkscreen extent -2.5,-0.7 2.1,0.7
SOT23-3 [mil]
  rect 36x36 smd: 1(0,0) 2(75,0)
  rect 36x50 smd: 3(38,80)
  silkscreen extent -20,-5 95,85
SOT23-5 [mm]
  rect 0.5x1 smd: 1(0,0) 2(1,0) 3(2,0) 4(2,3) 5(0,3)
  silkscreen extent -0.7,0.6 2.7,2.4
SOT23-6 [mm]
  rect 0.5x1 smd: 1(0,0) 2(1,0) 3(2,0) 4(2,3) 5(1,3) 6(0,3)
  silkscreen extent -0.7,0.6 2.7,2.4
SOT143-4 [mil]
  rect 40x60 smd: 1(0,0)
  rect 25x60 smd: 2(67,0) 3(67,76) 4(-8,76)
  silkscreen extent -38,-60 96,72
SSOP24 [mm]
  rect 2x0.45 smd: 1(0,0)
  oval 2x0.45 smd: 2(0,-0.65) 3(0,-1.3) 4(0,-1.95) 5(0,-2.6) 6(0,-3.25) 7(0,-3.9) 8(0,-4.55) 9(0,-5.2) 10(0,-5.85) 11(0,-6.5) 12(0,-7.15) 13(7.9,-7.15) 14(7.9,-6.5) 15(7.9,-5.85) 16(7.9,-5.2) 17(7.9,-4.55) 18(7.9,-3.9) 19(7.9,-3.25) 20(7.9,-2.6) 21(7.9,-1.95) 22(7.9,-1.3) 23(7.9,-0.65) 24(7.9,0)
  silkscreen extent -1.68,-7.48 6.06,0.33
SUPERCAP [mm]
  round 1.8 hole 1: 1(-2.54,0) 2(2.54,0)
  silkscreen extent -6.5,-22 6.5,-1.3
TRC1102 [mm]
  rect 1.7x0.8 smd: 1(-4.765,4.445)
  oval 1.7x0.8 smd: 2(-4.765,3.175) 3(-4.765,1.905) 4(-4.765,0.635) 5(-4.765,-0.635) 6(-4.765,-1.905) 7(-4.765,-3.175) 8(-4.765,-4.445) 9(4.765,-4.445) 10(4.765,-3.175) 11(4.765,-1.905) 12(4.765,-0.635) 13(4.765,0.635) 14(4.765,1.905) 15(4.765,3.175) 16(4.765,4.445)
  silkscreen extent -3.5,-6.5 3.5,6.5

## Part data
C1 C2 C4 C5 C6 C7 C8 C10 C12 C15 C16 C17 C18 C20 C21 C22 C23 C24 C26 C27 C28 C29 C30 C31 C39 C40: library part Cap, "Capacitor"
C3 C9 C11 C13 C14 C25: library part "CAP WP"
C19: library part "CAP NP_Dup2"
C32 C33 C34 C35 C52: library part CAP_Dup1
C36: library part "P_CAP NP"
C37 C38 C41 C42 C43 C44 C45 C46 C47 C48 C49 C50 C51: library part CAP
D1 D4 D5 D6 D7 D8 D9 D15 D31: library part "Diode 11DQ03", "Schottky Rectifier"
D2 D3 D10: library part MMGZ5231BPTLL34
D11 D12 D13 D14: library part LN01401_1
D16 D17 D18 D19 D20 D21 D22 D23 D24 D25 D26 D27 D28 D29 D30: library part PESD
F1: library part 2A_32VDC_0467-002
J1 J5 J6: library part "Header 4", "Header, 4-Pin"
J2: library part "Header 5", "Header, 5-Pin"
J3: library part "Header 3", "Header, 3-Pin"
J4: library part "Header 2", "Header, 2-Pin"
J8: "Header, 10-Pin, Dual row"
L1 L2: library part 4.7UH_CDH2D09BNP-4R7MC_0.7A_20%
L4: library part Inductor, "Inductor"
Q1 Q5 Q6: library part MMBT3904_NL_SOT23-3
Q2 Q3: library part MOSFET-N, "N-Channel MOSFET"
Q4: library part SI4431DY, "P-Channel 30V (D-S)  MOSFET"
R1 R7 R8 R12 R20 R21 R22 R23 R34 R35 R42 R45 R51 R66: library part CR16-1003FM
R2 R3 R4 R5 R6 R11 R43 R44 R62 R63 R64 R65: library part R
R9 R10 R13 R14 R15 R16 R17 R18 R19 R24 R25 R26 R27 R28 R29 R30 R31 R32 R33 R36 R37 R38 R39 R40 R41 R67 R68: library part Res3, "Resistor"
R46 R47 R48 R49 R50 R52 R53 R54 R55 R56 R57 R58 R59 R60 R61: library part P_R
U1: library part LM7321MF, "Single 30V High Output Current and Unlimited Capacitive Load Op Amp"
U2 U5: library part LM22670_0
U4 U6 U7: library part LD1117AS18, "IC VREG LDO 1.8V 1A 10V SOT-223"
U9: library part STM6315
U11: library part MIC2526_8P, "IC LIN SW PWR ACTIVE HIGH DUAL 2.7V-5.5V 0.5A SOIC8"
U12: library part TPS27081A
U13: library part GL823

## Free pads (board coordinates)
  round 50 on Plane2: 2(4594.49,1759.84) 2(4649.61,1744.09) 2(4814.96,716.54) 2(4826.77,1090.55) 2(4826.77,1125.98) 2(4862.2,1149.61) 2(4901.57,1149.61) 2(4940.94,1149.61) 2(4972.44,811.02) 2(4972.44,834.65) 2(4980.32,1149.61) 2(4980.32,1188.98) 2(5007.87,744.09) 2(5019.69,1149.61) 2(5019.69,1188.98) 2(5094.49,1381.89) 2(5102.36,1657.48) 2(5602.36,2003.94) 2(5692.91,2003.94) 3(5074.8,1657.48) 4(5047.24,1657.48) 5(5007.87,1618.11)
  round 236.22 hole 137.8: MT1(137.8,3543.29) MT3(6003.94,196.83) MT4(6003.94,3543.29)
  round 236.22 hole 137.8 paste+0: MT2(137.8,196.83)

## Via types
v1: diameter 24, hole 12, Top Layer to Bottom Layer, tented both sides, 264 vias
v2: diameter 18, hole 8, Top Layer to Bottom Layer, tented both sides, 138 vias

## Nets (pads, with @x,y where several pads share a name; then routed paths per layer and width w, separated by ;. In a path a pad name is that pad's centre, name@x,y a point inside that pad or via, vN(x,y) a via of type N, cw(c..) or ccw(c..) an arc to the next point about the centre after c; other vN are vias at no path point)
ACC: Q1.1 R1.2 U8.32 | length 1818.1
  Top Layer w4.7: R1.2@4862.39,2220.47 v2(4905.51,2220.47) 4937.01,2251.97 U8.32@4956.69,2251.97
  Bottom Layer w4.7: v2(4905.51,2220.47) 4905.51,2011.81 5569.61,1347.72 Q1.1@5569.61,784.83
ACC-IN: D2.1 F1.1 J1.4 | length 4093.1
  Bottom Layer w35: D2.1@6013.78,728.35 6067.49,728.35 6096.74,699.1
  Bottom Layer w70: F1.1@4948.82,3649.61 5539.37,3649.61 5614.17,3574.8 5614.17,3405.51 5917.32,3102.36 5917.32,1393.7 6000,1311.02 6059.06,1311.02 6096.74,1273.34 6096.74,699.1 6013.78,616.14 6013.78,600.39 J1.4@5972.44,559.06
AUDIO-IN1: D23.1 J8.1 M1.C5 | length 4958.7
  Top Layer w4.7: M1.C5@2712.64,439.45 2712.64,519.72 2751.97,559.06 2751.97,850.39 3874.02,1972.44 3874.02,2460.63 4326.77,2913.39 4326.77,3169.29 4535.43,3377.95 5307.09,3377.95 5354.33,3330.71 5354.33,3224.41 5374.02,3204.72 5448.82,3204.72 J8.1@5503.94,3259.84
  Bottom Layer w35: J8.1@5503.94,3259.84 D23.1@5503.94,3399.61
AUDIO-IN2: D28.2 J8.7 M1.C9 | length 4480.7
  Top Layer w4.7: M1.C9@2870.12,439.45 2870.12,472.48 2909.45,511.81 2909.45,937.01 3921.26,1948.82 3921.26,2444.88 4374.02,2897.64 4374.02,3137.8 4559.06,3322.83 5027.56,3322.83 5055.12,3295.28 5055.12,3228.35 5074.8,3208.66 5161.42,3208.66 5203.94,3251.18 J8.7@5203.94,3259.84
  Bottom Layer w35: J8.7@5203.94,3259.84 5203.94,3398.82 D28.2@5204.72,3399.61
AUDIO-IN3: D25.1 J8.2 M1.C13 | length 4576.6
  Top Layer w4.7: M1.C13@3027.6,439.45 3027.6,535.47 3066.93,574.8 3066.93,1011.81 3968.5,1913.39 3968.5,2425.2 4421.26,2877.95 4421.26,3110.24 4500,3188.98 5043.31,3188.98 5055.12,3177.17 5307.09,3177.17 5358.27,3125.98 5358.27,3066.93 5374.02,3051.18 5452.76,3051.18 J8.2@5503.94,3102.36
  Bottom Layer w35: D25.1@5503.94,3001.97 J8.2@5503.94,3102.36
AUDIO-IN4: D30.2 J8.8 M1.C17 | length 4141.6
  Top Layer w4.7: M1.C17@3185.08,439.45 3185.08,523.66 3224.41,562.99 3224.41,1090.55 4015.75,1881.89 4015.75,2401.57 4472.44,2858.27 4472.44,3090.55 4539.37,3157.48 5023.62,3157.48 5055.12,3125.98 5055.12,3074.8 5082.68,3047.24 5145.67,3047.24 5200.79,3102.36 J8.8@5203.94,3102.36
  Bottom Layer w35: D30.2@5203.94,3002.76 J8.8@5203.94,3102.36
AVDD: C40.1 C41.2 L4.2 U13.21 | length 288.9
  Bottom Layer w20: C41.2@1452.76,1704.91 1452.94,1704.72 L4.2@1598.43,1704.72 1598.43,1736.22 1639.76,1777.56 U13.21@1639.76,1830.71
DEBUG-RXD: J3.2 M1.B34 | length 480.6
  Top Layer w4.7: M1.B34@1833.78,636.3 1833.78,567.79 1874.02,527.56 1874.02,318.9 1923.62,269.29 J3.2@1923.62,192.91
DEBUG-TXD: J3.1 M1.B33 | length 482.5
  Top Layer w4.7: M1.B33@1833.78,439.45 1833.78,300.08 1874.02,259.84 1874.02,157.48 1897.64,133.86 1964.57,133.86 J3.1@2023.62,192.91
E0-RX_N: L3.8 M1.A1 | length 757.2
  Top Layer w3.8: M1.A1@3021.65,3276.14 3021.65,3214.57 3060.18,3176.04 3060.18,2916.2 3137.8,2838.58 3232.28,2838.58 3244.09,2850.39 3244.09,2870.08 3240.16,2874.02 v2(3233.99,2874.02)
  Bottom Layer w3.8: L3.8@3202.95,2981.69 3202.95,2962.4 3244.09,2921.26 3244.09,2884.12 v2(3233.99,2874.02)
E0-RX_P: L3.6 M1.A2 | length 590
  Top Layer w3.8: M1.A2@3021.65,3079.29 3021.65,3038.02 3051.18,3008.49 3051.18,2912.47 3134.07,2829.58 3236.01,2829.58 3253.09,2846.67 3253.09,2870.08 3257.03,2874.02 v2(3263.19,2874.02)
  Bottom Layer w3.8: v2(3263.19,2874.02) 3253.09,2884.12 3253.09,2918.45 3302.95,2968.31 L3.6@3302.95,2981.69
E0-TX_N: L3.3 M1.A3 | length 1157.8
  Top Layer w3.8: M1.A3@2942.91,3276.14 2942.91,3198.82 2977.5,3164.23 2977.5,2904.39 3086.61,2795.28 3480.32,2795.28 3500,2814.96 3500,2862.2 3492.13,2870.08 v2(3489.9,2870.08)
  Bottom Layer w3.8: L3.3@3452.95,2981.69 3452.95,2968.31 3500,2921.26 3500,2880.18 v2(3489.9,2870.08)
E0-TX_P: L3.1 M1.A4 | length 985.8
  Top Layer w3.8: M1.A4@2942.91,3079.29 2942.91,3038.02 2968.5,3012.43 2968.5,2900.66 3082.89,2786.28 3484.04,2786.28 3509,2811.23 3509,2862.2 3516.87,2870.08 v2(3519.1,2870.08)
  Bottom Layer w3.8: v2(3519.1,2870.08) 3509,2880.18 3509,2922.39 3552.95,2966.34 L3.1@3552.95,2981.69
ETH-RX_N: J6.4 L3.9 | length 237.2
  Top Layer w3.8: v2(3236.81,3413.39) 3239.03,3413.39 3246.91,3421.26 3246.91,3436.8 3258.93,3448.82 3287.4,3448.82 3294.71,3456.13 3294.71,3488.75 J6.4@3259.84,3523.62
  Bottom Layer w3.8: L3.9@3202.95,3356.89 3202.95,3379.53 v2(3236.81,3413.39)
ETH-RX_P: J6.3 L3.11 | length 238.5
  Top Layer w3.8: v2(3266.01,3413.39) 3263.78,3413.39 3255.91,3421.26 3255.91,3433.07 3262.65,3439.82 3291.13,3439.82 3303.71,3452.4 3303.71,3488.75 J6.3@3338.58,3523.62
  Bottom Layer w3.8: v2(3266.01,3413.39) 3302.95,3376.44 L3.11@3302.95,3356.89
ETH-TX_N: J6.2 L3.14 | length 230.2
  Top Layer w3.8: J6.2@3417.32,3523.62 3452.19,3488.75 3452.19,3456.9 3473.21,3435.88 3489.32,3435.88 3496.06,3429.13 3496.06,3417.32 3492.13,3413.39 v2(3485.96,3413.39)
  Bottom Layer w3.8: L3.14@3452.95,3356.89 3452.95,3380.38 v2(3485.96,3413.39)
ETH-TX_P: J6.1 L3.16 | length 232.2
  Top Layer w3.8: J6.1@3496.06,3523.62 3461.19,3488.75 3461.19,3460.63 3476.94,3444.88 3493.04,3444.88 3505.06,3432.86 3505.06,3417.32 3509,3413.39 v2(3515.16,3413.39)
  Bottom Layer w3.8: v2(3515.16,3413.39) 3552.95,3375.6 L3.16@3552.95,3356.89
GND: C1.2 C2.1 C3.2 C4.1 C5.1 C6.2 C8.2 C10.1 C11.2 C12.1 C14.2 C15.2 C16.2 C18.2 C20.2 C21.2 C22.2 C23.2 C24.1 C25.2 C26.1 C27.2 C28.2 C29.2 C30.2 C31.2 C32.2 C33.2 C34.2 C35.2 C37.2 C38.1 C39.2 C40.2 C41.1 C42.1 C43.1 C44.1 C45.1 C46.1 C47.1 C48.1 C49.1 C50.1 C51.1 C52.2 D3.2 D4.1 D7.1 D9.1 D10.2 D16.1 D17.1 D18.1 D19.1 D20.1 D21.1 D22.1 D23.2 D24.2 D25.2 D26.2 D27.1 D28.1 D29.1 D30.1 J1.2 J2.5 J3.3 J4. J4.2 J5. J5.4 J6. J7. J7.3 J7.6 J8.5 J8.6 J8.11 J8.12 M1.A5 M1.A7 M1.A9 M1.A11 M1.A13 M1.A15 M1.A17 M1.A19 M1.A21 M1.A29 M1.A43 M1.A44 M1.A49 M1.A59 M1.A60 M1.B6 M1.B11 M1.B12 M1.B17 M1.B18 M1.B23 M1.B24 M1.B26 M1.B45 M1.B47 M1.B48 M1.C3 M1.C4 M1.C7 M1.C8 M1.C11 M1.C12 M1.C15 M1.C16 M1.C19 M1.C20 M1.C23 M1.C24 M1.C27 M1.C28 M1.C31 M1.C32 M1.C35 M1.C36 M1.MT5 M1.MT6 M1.MT7 M1.MT8 pad.MT1 pad.MT2 pad.MT3 pad.MT4 Q1.3 Q2.3 Q3.3 Q5.3 Q6.3 R6.2 R8.1 R9.2 R11.2 R17.2 R18.2 R23.1 R26.2 R29.2 R33.2 R41.2 R44.1 R45.1 R47.1 R48.1 R51.1 R55.2 R59.2 R61.2 R62.2 R63.1 R64.2 R65.1 U1.2 U2.6 U2.9 U3.3 U4.1 U5.6 U5.9 U6.1 U7.1 U8.3 U8.5 U8.7 U8.8 U8.12 U8.21 U8.22 U8.23 U8.24 U8.33 U9.1 U10.5 U11.4 U11.6 U13.5 U13.16 U13.17 U13.22 | length 1172.6
  Top Layer w4.7: U8.24@4980.31,2385.83 4980.31,2413.39 v2(4996.06,2429.13) U8.23@4996.06,2385.83 ; U8.3@5011.81,2228.35 5011.81,2204.72 v2(5031.5,2185.04) 5043.31,2196.85 U8.5@5043.31,2228.35 ; U8.33@5011.81,2283.46 v2(5035.43,2307.09) U8.33@5043.31,2299.21 ; U8.22@5011.81,2385.83 5011.81,2413.39 v2(5027.56,2429.13) U8.21@5027.56,2385.83 ; U8.7@5074.8,2228.35 5074.8,2196.85 v2(5086.61,2185.04) 5090.55,2188.98 U8.8@5090.55,2228.35 ; U8.12@5114.17,2299.21 5153.54,2299.21 v2(5149.61,2303.15)
  Top Layer w15: v2(4787.4,2314.96) C28.2@4822.27,2314.96 ; R9.2@5094.49,1346.65 v2(5094.49,1381.89)
  Top Layer w18: v2(4594.49,1759.84) R23.1@4594.49,1794.83 ; v2(4649.61,1744.09) Q5.3@4649.61,1779.33
  Top Layer w20: U5.6@4431.5,572.44 U5.9@4431.5,656.69 ; U2.6@5285.83,1072.44 U2.9@5285.83,1156.69
  Bottom Layer w15: C34.2@3086.61,3126.17 v2(3086.61,3161.42) ; v2(3677.17,3362.2) 3680.91,3358.46 C52.2@3680.91,3326.77 ; C35.2@3681.1,3126.17 v2(3681.1,3161.42) ; v1(5307.09,464.57) C4.1@5307.09,499.56
  Bottom Layer w18: U13.22@1614.17,1830.71 v1(1614.17,1893.7) ; U13.5@1665.35,2141.73 v1(1665.35,2204.72) ; v1(1740.16,1893.7) 1742.13,1891.73 U13.17@1742.13,1830.71 ; U13.16@1767.72,1830.71 v1(1767.72,1893.7)
  other v1: 968.5,366.14 1204.72,366.14 1440.94,366.14 2307.09,366.14 2385.83,366.14 2633.86,366.14 2791.34,366.14 2948.82,366.14 3106.3,366.14 3263.78,366.14 3421.26,366.14 3578.74,366.14 3736.22,366.14 3893.7,366.14 4216.54,377.95 4251.97,377.95 4216.54,413.39 4251.97,413.39 4216.54,448.82 4251.97,448.82 4216.54,484.25 4251.97,484.25 732.28,539.37 968.5,539.37 1204.72,539.37 1440.94,539.37 1519.68,539.37 2307.09,539.37 2385.83,539.37 2633.86,539.37 2791.34,539.37 2948.82,539.37 3106.3,539.37 3263.78,539.37 3421.26,539.37 3578.74,539.37 3736.22,539.37 3893.7,539.37 4413.39,645.67 4456.69,645.67 4500,645.67 4413.39,681.1 4500,681.1 4456.69,681.89 732.28,708.66 968.5,708.66 1204.72,708.66 1440.94,708.66 1519.68,708.66 2385.83,708.66 2633.86,708.66 2791.34,708.66 2948.82,708.66 3106.3,708.66 3263.78,708.66 3421.26,708.66 3578.74,708.66 3736.22,708.66 3893.7,708.66 4413.39,716.54 4456.69,716.54 4500,716.54 4637.8,716.54 4673.23,716.54 4708.66,716.54 4744.09,716.54 4779.53,716.54 4814.96,716.54 4637.8,751.97 4637.8,787.4 4358.27,976.38 4366.14,1043.31 4366.14,1078.74 4826.77,1090.55 4421.26,1125.98 4826.77,1125.98 5196.85,1145.67 5267.72,1145.67 5311.02,1145.67 5354.33,1145.67 4862.2,1149.61 4901.57,1149.61 4940.94,1149.61 4980.32,1149.61 5019.69,1149.61 5196.85,1181.1 5267.72,1181.1 5311.02,1181.1 5354.33,1181.1 4980.32,1188.98 5019.69,1188.98 5909.45,1208.66 5948.82,1208.66 5988.19,1208.66 6027.56,1208.66 5196.85,1216.54 5267.72,1216.54 5311.02,1216.54 5354.33,1216.54 5909.45,1244.09 5948.82,1244.09 5988.19,1244.09 6027.56,1244.09 5007.87,1618.11 5047.24,1657.48 5074.8,1657.48 5102.36,1657.48 5240.16,1854.33 5275.59,1854.33 5311.02,1854.33 5346.46,1854.33 5240.16,1889.76 5275.59,1889.76 5311.02,1889.76 5346.46,1889.76 2834.65,1992.13 5602.36,2003.94 5692.91,2003.94 2834.65,2082.68 5464.57,2169.29 2677.17,2173.23 2708.66,2173.23 5464.57,2204.72 5464.57,2240.16 5106.3,2842.52 5204.72,2842.52 5401.57,2842.52 5503.94,2842.52 736.22,2988.19 1370.08,3000 1917.32,3192.91 2232.28,3192.91 2389.76,3192.91 2468.5,3192.91 2547.24,3192.91 2625.98,3192.91 2704.72,3192.91 2783.46,3192.91 2862.2,3192.91 688.98,3299.21 1129.92,3334.65 1366.14,3354.33 1917.32,3354.33 2232.28,3354.33 2311.02,3354.33 2389.76,3354.33 2468.5,3354.33 2547.24,3354.33 2625.98,3354.33 2704.72,3354.33 2783.46,3354.33 2862.2,3354.33 5102.36,3559.06 5204.72,3559.06 5405.51,3559.06 5503.94,3559.06
  other v2: 2633.86,62.99 2586.61,114.17 3098.43,145.67 3125.98,145.67 2645.67,192.91 3220.47,192.91 1598.43,220.47 2645.67,244.09 3220.47,244.09 2645.67,295.28 3507.87,303.15 3535.43,303.15 4976.38,460.63 4976.38,488.19 5818.9,681.1 5688.98,712.6 5708.66,728.35 5755.91,728.35 5007.87,744.09 4972.44,811.02 4972.44,834.65 5421.26,897.64 5468.5,897.64 2047.24,1566.93 1519.68,1586.61 1885.83,1586.61 1452.76,1629.92 1665.35,1629.92 1818.9,1629.92 2232.28,1669.29 1492.13,1984.25 1476.38,2039.37 4968.5,2062.99 5346.46,2161.42 5200.79,2188.98 5283.46,2232.28 4992.13,2263.78 5078.74,2263.78 1688.98,2322.83 4992.13,2350.39 5078.74,2350.39 4720.47,2444.88 535.43,2460.63 625.98,2460.63 1799.21,2480.32 1314.96,2500 1381.89,2500 1874.02,2500 1988.19,2500 1799.21,2515.75 2066.93,2531.5 1799.21,2547.24 1220.47,2574.8 1625.98,2578.74 720.47,2590.55 720.47,2622.05 1240.16,2625.98 1625.98,2625.98 1751.97,2625.98 1948.82,2625.98 2062.99,2625.98 2141.73,2657.48 1421.26,2661.42 1468.5,2661.42 1492.13,2661.42 1732.28,2661.42 1755.91,2661.42 2393.7,2740.16 862.2,3165.35 889.76,3165.35 1090.55,3185.04 980.31,3358.27 527.56,3413.39 937.01,3425.2 527.56,3440.94 2515.75,3629.92
HISI-CTS: M1.B32 R37.2 | length 4151.7
  Top Layer w4.7: M1.B32@1755.04,636.3 1755.04,873.15 2015.75,1133.86 2633.86,1133.86 3669.29,2169.29 v2(3669.29,2409.45) ; v2(4185.04,2409.45) 4566.93,2409.45 4637.8,2480.32 4771.65,2480.32 4822.2,2429.76 R37.2@4822.2,2409.45
  Bottom Layer w4.7: v2(3669.29,2409.45) v2(4185.04,2409.45)
HISI-RTS: M1.B31 R36.2 | length 4334.3
  Top Layer w4.7: M1.B31@1755.04,439.45 1755.04,518.82 1795.28,559.06 1795.28,877.95 2027.56,1110.24 2645.67,1110.24 3696.85,2161.42 v2(3696.85,2381.89) ; v2(4212.6,2381.89) 4570.87,2381.89 4653.54,2464.57 4759.84,2464.57 4791.34,2433.07 4791.34,2393.07 R36.2@4822.2,2362.2
  Bottom Layer w4.7: v2(3696.85,2381.89) v2(4212.6,2381.89)
HISI-RXD: M1.B36 R39.2 | length 3692.6
  Top Layer w4.7: M1.B36@1912.52,636.3 1912.52,959.76 2039.37,1086.61 2657.48,1086.61 3724.41,2153.54 v2(3724.41,2220.47) ; v2(4212.6,2220.47) R39.2@4720.28,2220.47
  Bottom Layer w4.7: v2(3724.41,2220.47) v2(4212.6,2220.47)
HISI-TXD: M1.B35 R38.2 | length 4016.5
  Top Layer w4.7: M1.B35@1912.52,439.45 1912.52,526.69 1952.76,566.93 1952.76,964.57 2051.18,1062.99 2669.29,1062.99 3748.03,2141.73 v2(3748.03,2248.03) ; v2(4185.04,2248.03) 4188.98,2244.09 4779.53,2244.09 4803.15,2267.72 R38.2@4822.2,2267.72
  Bottom Layer w4.7: v2(3748.03,2248.03) v2(4185.04,2248.03)
HW-VER: R28.1 R29.1 U8.1 | length 142.7
  Top Layer w4.7: U8.1@4980.31,2228.35 4980.31,2149.61 R29.1@4968.5,2137.8 R28.1@5015.75,2137.8
ICE-CLK: J2.3 U8.19 | length 444.7
  Top Layer w4.7: J2.3@4841.73,2649.61 4841.73,2520.47 4862.2,2500 5011.81,2500 5062.99,2448.82 5062.99,2409.45 5059.05,2405.51 U8.19@5059.05,2385.83
ICE-DATA: J2.2 U8.20 | length 499
  Top Layer w4.7: J2.2@4741.73,2649.61 4741.73,2565.35 4826.77,2480.32 5003.94,2480.32 5051.18,2433.07 5051.18,2417.32 5043.31,2409.45 U8.20@5043.31,2385.83
ICE-RST: J2.4 R27.2 | length 96.4
  Top Layer w4.7: R27.2@4937.2,2555.12 4937.2,2645.07 J2.4@4941.73,2649.61
LOCK: R31.1 R33.1 U8.9 | length 149.4
  Top Layer w4.7: U8.9@5114.17,2251.97 5188.54,2251.97 R33.1@5208.22,2232.28 R31.1@5208.22,2279.53
MCU-3V3: C21.1 C28.1 J2.1 R1.1 R3.1 R28.2 R31.2 R34.1 R35.1 R40.2 U7.2 U7.4 U8.6 U8.13 U8.28 U9.4 | length 476.6
  Top Layer w4.7: v2(5059.06,2185.04) U8.6@5059.05,2228.35 ; U8.13@5114.17,2314.96 5137.8,2314.96 v2(5149.61,2326.77) ; R31.2@5248.22,2279.53 v2(5283.46,2279.53)
  Top Layer w10: v2(4681.1,2267.72) R3.1@4719.65,2267.72 ; R1.1@4822.39,2220.47 4822.39,2189.42 v2(4822.83,2188.98) ; C28.1@4862.27,2314.96 U8.28@4956.69,2314.96 ; v2(5015.75,2062.99) R28.2@5015.75,2097.8 ; v2(5062.99,2062.99) R40.2@5062.99,2097.8 ; R35.1@5279.53,2685.48 v2(5279.53,2720.47) ; R34.1@5393.7,2685.48 v2(5393.7,2720.47)
  Top Layer w20: U9.4@5276.79,2157.61 5291.46,2157.61 v2(5318.9,2185.04)
  other v1: 5515.75,2535.43 5559.06,2535.43 5602.36,2535.43 5645.67,2535.43 5688.98,2535.43 5732.28,2535.43
  other v2: 4909.45,2314.96
MCU-CTS: R36.1 U8.26 | length 101
  Top Layer w4.7: R36.1@4862.2,2362.2 4913.39,2362.2 4929.13,2346.46 U8.26@4956.69,2346.46
MCU-PWR-DET: Q3.1 R3.2 U8.29 | length 1992.1
  Top Layer w4.7: R3.2@4759.65,2267.72 4783.28,2291.34 v2(4783.46,2291.34) 4913.39,2291.34 4921.26,2299.21 U8.29@4956.69,2299.21
  Bottom Layer w4.7: v2(4783.46,2291.34) 4755.91,2318.9 4755.91,2350.39 4740.16,2366.14 4673.23,2366.14 4657.48,2350.39 4657.48,2106.3 4960.63,1803.15 4960.63,1515.75 5031.5,1444.88 5031.5,1291.34 5070.87,1251.97 5070.87,1110.24 5043.31,1082.68 4972.44,1082.68 4950.19,1060.43 Q3.1@4950.19,1013.07
MCU-RST: R27.1 R40.1 U8.2 U9.2 | length 731.1
  Top Layer w4.7: R27.1@4897.2,2555.12 4897.2,2524.06 v2(4897.64,2523.62) ; U8.2@4996.06,2228.35 4996.06,2185.04 v2(5003.94,2177.17) 5015.75,2165.35 5035.43,2165.35 R40.1@5062.99,2137.8 5125.91,2137.8 5181.1,2082.61 U9.2@5200.79,2082.61
  Bottom Layer w4.7: v2(4897.64,2523.62) 4948.82,2472.44 4948.82,2200.79 4972.44,2177.17 v2(5003.94,2177.17)